# EAGLE board SparkX_EZ_LiPo_Power-Panel (EAGLE 9.6.2), part 1 of 14
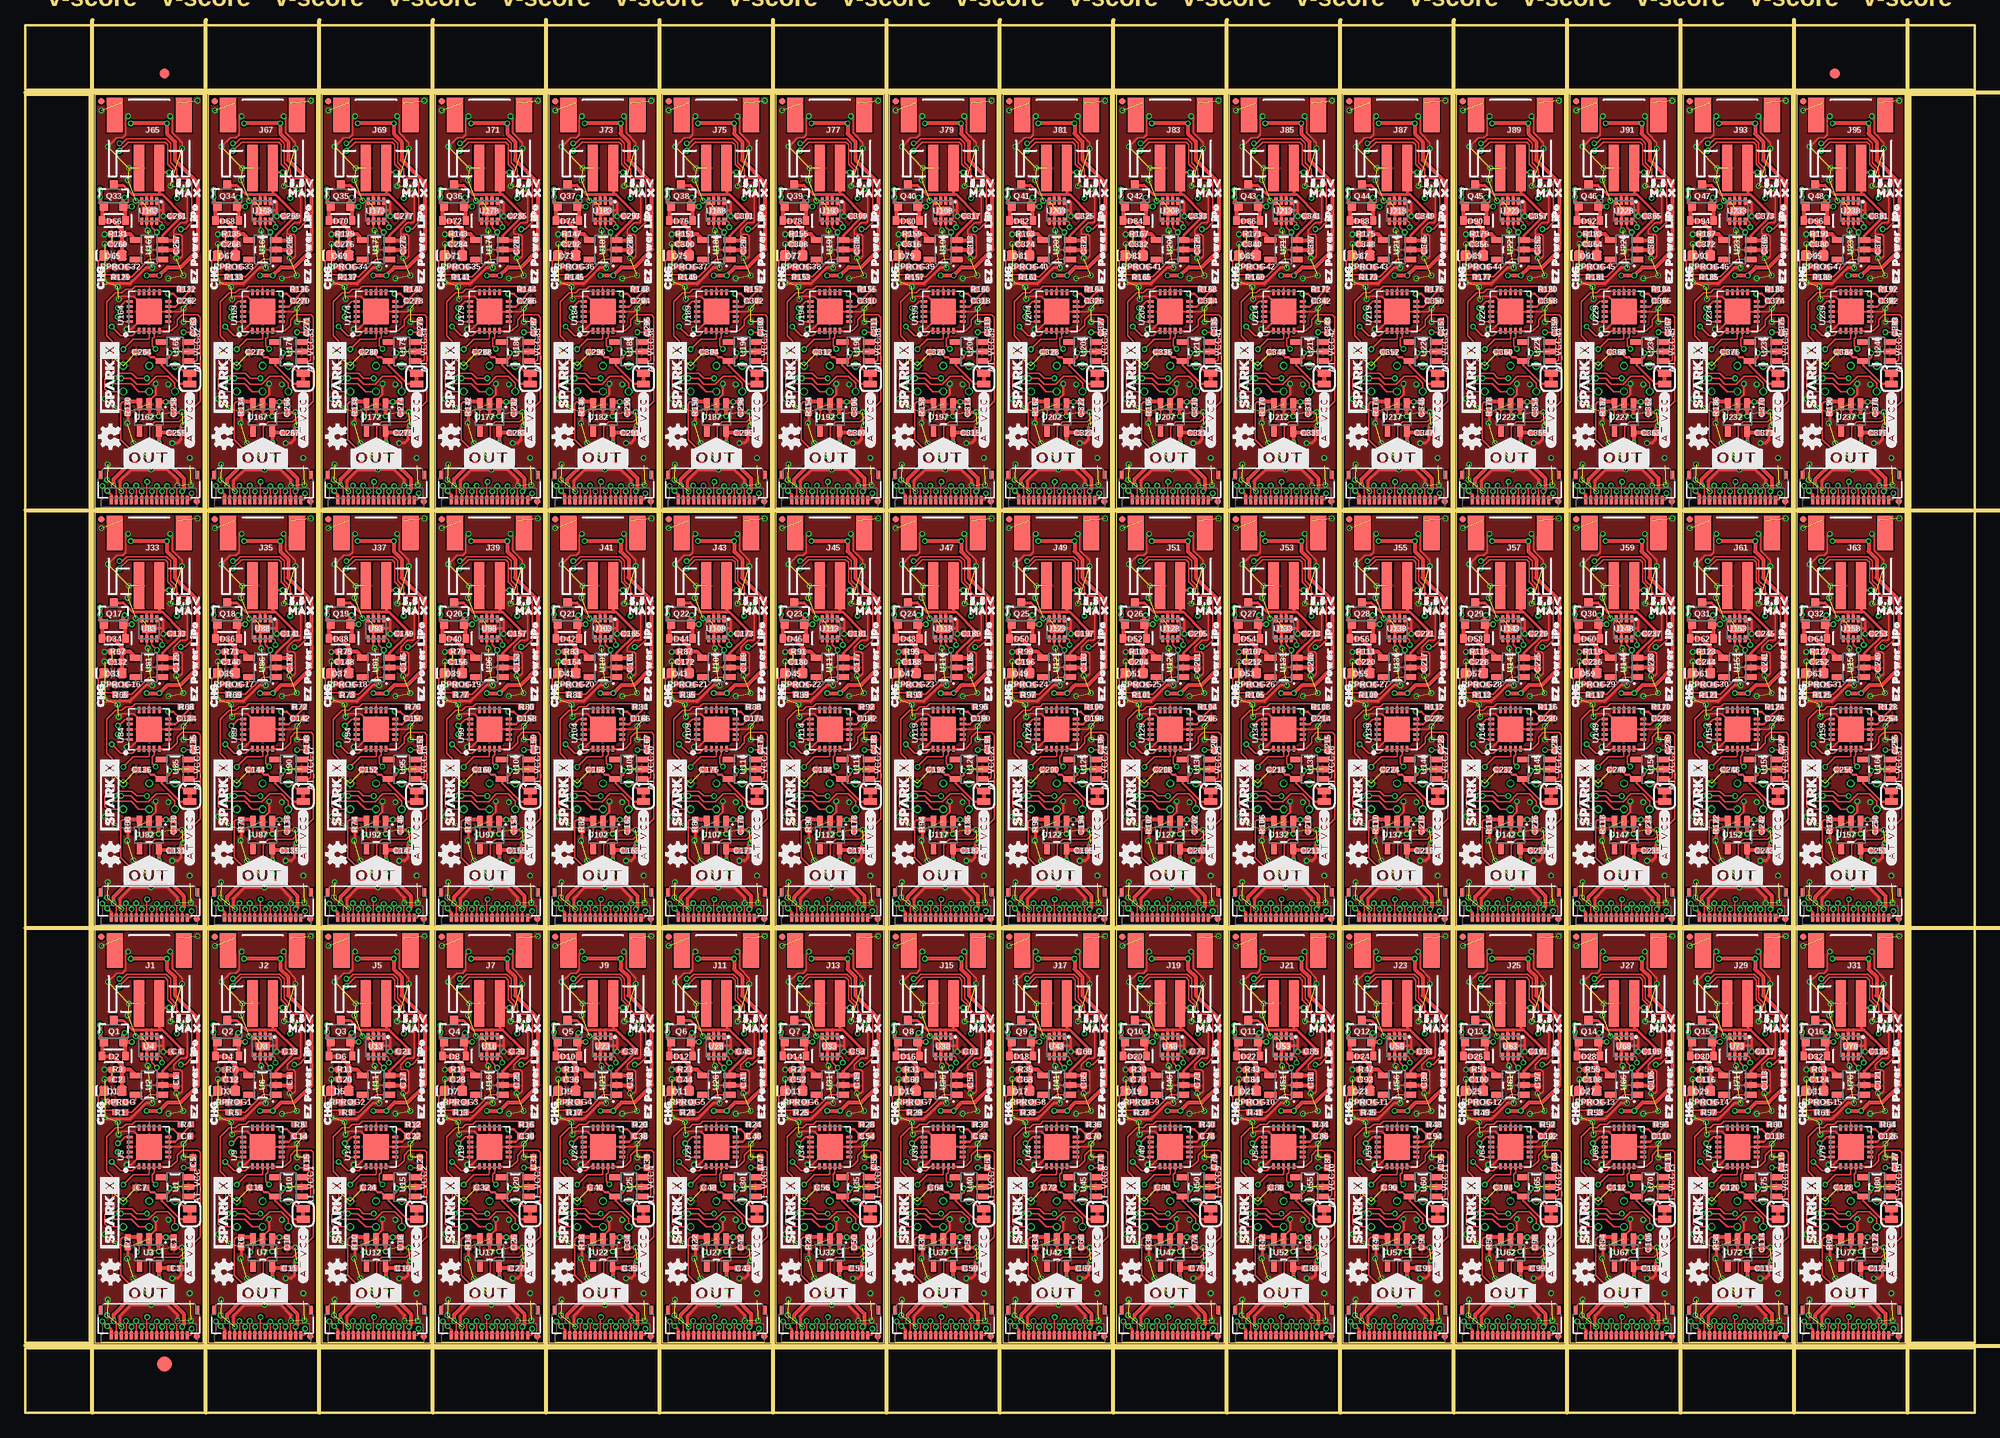
[diagram p0: board, top side]
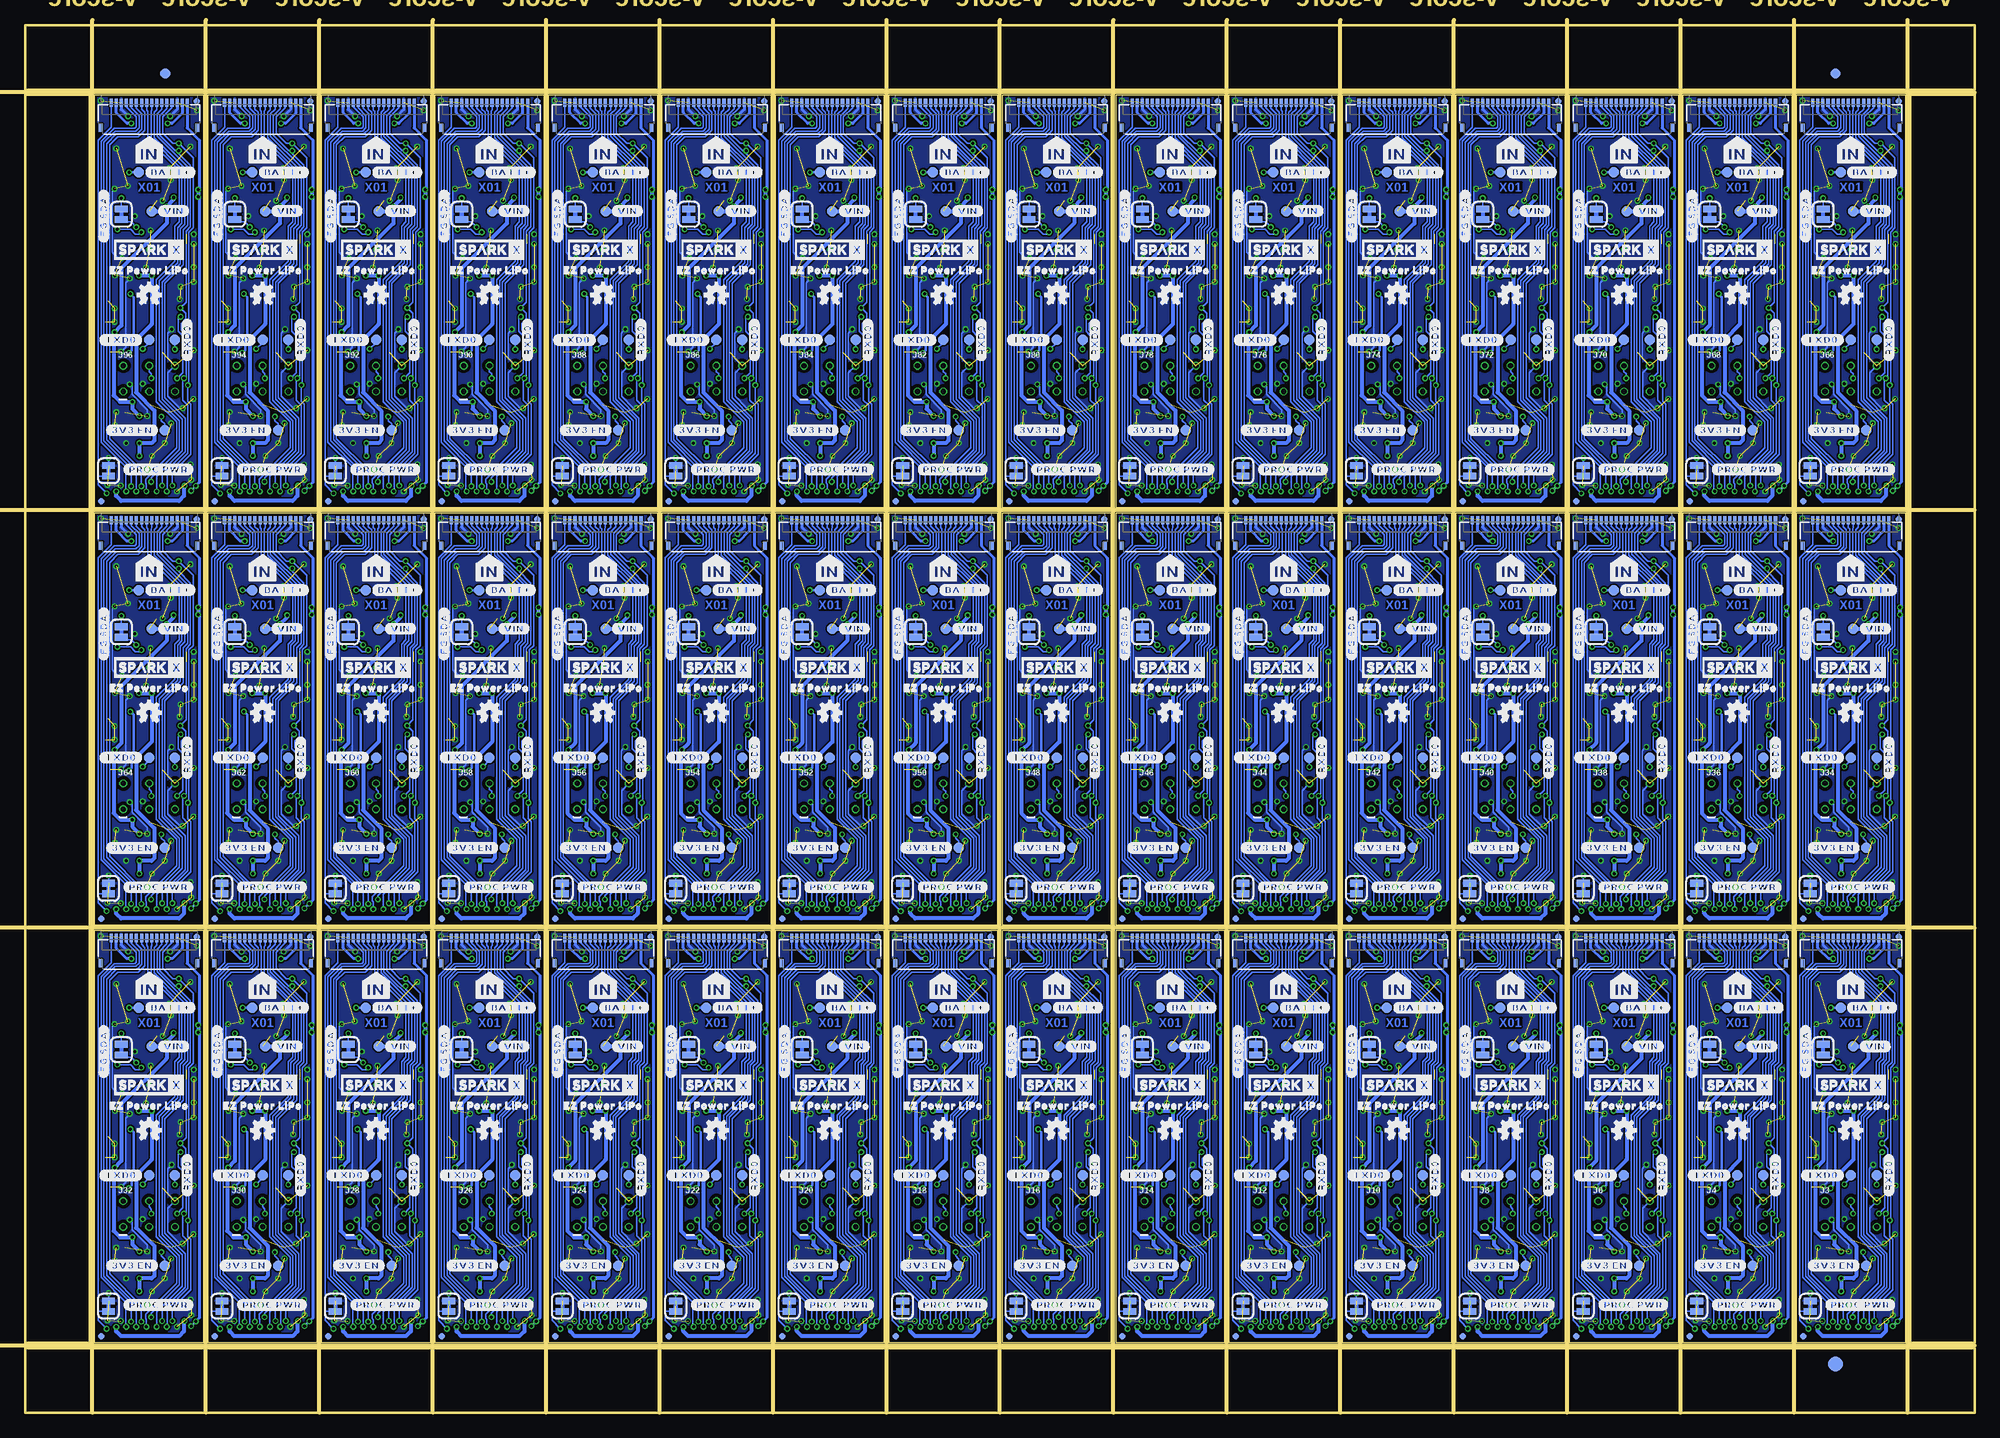
[diagram p1: board, bottom side, seen from below]

Size 192.02 x 136.65 mm. Coordinates in mm from the lower left corner, seen from the top.
Outline: 208 segments
Copper layers (1*16): Top 0.035mm / dielectric 1.5mm / Bottom 0.035mm
Design rules "SparkX_EZ_LiPo_Power": minimum track width 5mil, minimum drill 0.3mm, track to track 5mil, track to pad 5mil, pad to pad 5mil, via to via 5mil, smd to smd 5mil, copper to edge 7mil, drill to drill 7mil, minimum pad ring 5mil, minimum via ring 5mil, stop-mask expansion 2.5mil, vias tented up to drill 25mil, thermal gap 10mil
bRestrict: area 9.1,20.3 to 10.2,21.3; area 11.7,20.3 to 12.7,21.3; area 14.2,20.3 to 15.2,21.3; area 14.2,17.8 to 15.2,18.8; area 11.7,17.8 to 12.7,18.8; area 9.1,17.8 to 10.2,18.8; area 20.3,20.3 to 21.3,21.3; area 22.9,20.3 to 23.9,21.3; area 25.4,20.3 to 26.4,21.3; area 25.4,17.8 to 26.4,18.8; area 22.9,17.8 to 23.9,18.8; area 20.3,17.8 to 21.3,18.8; 276 more areas
Milling: 21 lines

## Footprints (pad centres in the part's own frame; a part is rotated, then mirrored left to right if it is on the bottom)
PAD.03X.04 = smd 1.016 x 1.016: 1 0,0
SMT-JUMPER_2_NC_TRACE_SILK = smd 0.66 x 1.27: 1 -0.521,0; 2 0.521,0
0402-TIGHT = smd 0.6 x 0.6: 1 -0.5,0; 2 0.5,0
LED-0603 = smd 1 x 1: A -0.877,0; C 0.877,0
SOD-323 = smd 0.63 x 0.83: A 1.15,0; C -1.15,0
FIDUCIAL-1X2 = smd 1 x 1: 1 0,0
FIDUCIAL-1.5X3 = smd 1.5 x 1.5: 1 0,0
FIDUCIAL-MICRO = smd 0.635 x 0.635: 1 0,0
FPC_16_DOUBLESIDED_BACKFLIP = smd 0.3 x 0.8: 1 -3.75,1.35; 2 -3.25,1.35; 3 -2.75,1.35; 4 -2.25,1.35; 5 -1.75,1.35; 6 -1.25,1.35; 7 -0.75,1.35; 8 -0.25,1.35; 9 0.25,1.35; 10 0.75,1.35; 11 1.25,1.35; 12 1.75,1.35; 13 2.25,1.35; 14 2.75,1.35; 15 3.25,1.35; 16 3.75,1.35 | smd 0.4 x 0.8: MP1 -4.75,-1.15; MP2 4.75,-1.15
JST-2-SMD = smd 1 x 4.6: 1 -1,-3.7; 2 1,-3.7 | smd 1.6 x 3.4: NC1 -3.4,1.5; NC2 3.4,1.5
2X3_TEST_POINTS = drill 0.508: 1 -2.54,-1.27; 2 -2.54,1.27; 3 0,-1.27; 4 0,1.27; 5 2.54,-1.27; 6 2.54,1.27
SOT23-3 = smd 0.8 x 0.9: 1 -0.95,-1; 2 0.95,-1; 3 0,1.1
SOT23-5 = smd 0.55 x 1.2: 1 -0.95,-1.3; 2 0,-1.3; 3 0.95,-1.3; 4 0.95,1.3; 5 -0.95,1.3
DFN-8 = smd 0.3 x 0.7: 1 -0.75,-0.99; 2 -0.25,-0.99; 3 0.25,-0.99; 4 0.75,-0.99; 5 0.75,0.99; 6 0.25,0.99; 7 -0.25,0.99; 8 -0.75,0.99 | smd 1.38 x 0.8: 9 0,0
QFN20_20M1 = smd 0.6 x 0.25: 1 -1.9,1; 2 -1.9,0.5; 3 -1.9,0; 4 -1.9,-0.5; 5 -1.9,-1; 11 1.9,-1; 12 1.9,-0.5; 13 1.9,0; 14 1.9,0.5; 15 1.9,1 | smd 0.25 x 0.6: 6 -1,-1.9; 7 -0.5,-1.9; 8 0,-1.9; 9 0.5,-1.9; 10 1,-1.9; 16 1,1.9; 17 0.5,1.9; 18 0,1.9; 19 -0.5,1.9; 20 -1,1.9 | smd 2.5 x 2.5: PAD 0,0

## Placement (x,y rotation side)
3V3_EN  TEST-POINT3X4  [PAD.03X.04]  10.67,14.48 0 bottom
3V3_EN1  TEST-POINT3X4  [PAD.03X.04]  21.84,14.48 0 bottom
3V3_EN2  TEST-POINT3X4  [PAD.03X.04]  33.02,14.48 0 bottom
3V3_EN3  TEST-POINT3X4  [PAD.03X.04]  44.2,14.48 0 bottom
3V3_EN4  TEST-POINT3X4  [PAD.03X.04]  55.37,14.48 0 bottom
3V3_EN5  TEST-POINT3X4  [PAD.03X.04]  66.55,14.48 0 bottom
3V3_EN6  TEST-POINT3X4  [PAD.03X.04]  77.72,14.48 0 bottom
3V3_EN7  TEST-POINT3X4  [PAD.03X.04]  88.9,14.48 0 bottom
3V3_EN8  TEST-POINT3X4  [PAD.03X.04]  100.08,14.48 0 bottom
3V3_EN9  TEST-POINT3X4  [PAD.03X.04]  111.25,14.48 0 bottom
3V3_EN10  TEST-POINT3X4  [PAD.03X.04]  122.43,14.48 0 bottom
3V3_EN11  TEST-POINT3X4  [PAD.03X.04]  133.6,14.48 0 bottom
3V3_EN12  TEST-POINT3X4  [PAD.03X.04]  144.78,14.48 0 bottom
3V3_EN13  TEST-POINT3X4  [PAD.03X.04]  155.96,14.48 0 bottom
3V3_EN14  TEST-POINT3X4  [PAD.03X.04]  167.13,14.48 0 bottom
3V3_EN15  TEST-POINT3X4  [PAD.03X.04]  178.31,14.48 0 bottom
3V3_EN16  TEST-POINT3X4  [PAD.03X.04]  10.67,55.63 0 bottom
3V3_EN17  TEST-POINT3X4  [PAD.03X.04]  21.84,55.63 0 bottom
3V3_EN18  TEST-POINT3X4  [PAD.03X.04]  33.02,55.63 0 bottom
3V3_EN19  TEST-POINT3X4  [PAD.03X.04]  44.2,55.63 0 bottom
3V3_EN20  TEST-POINT3X4  [PAD.03X.04]  55.37,55.63 0 bottom
3V3_EN21  TEST-POINT3X4  [PAD.03X.04]  66.55,55.63 0 bottom
3V3_EN22  TEST-POINT3X4  [PAD.03X.04]  77.72,55.63 0 bottom
3V3_EN23  TEST-POINT3X4  [PAD.03X.04]  88.9,55.63 0 bottom
3V3_EN24  TEST-POINT3X4  [PAD.03X.04]  100.08,55.63 0 bottom
3V3_EN25  TEST-POINT3X4  [PAD.03X.04]  111.25,55.63 0 bottom
3V3_EN26  TEST-POINT3X4  [PAD.03X.04]  122.43,55.63 0 bottom
3V3_EN27  TEST-POINT3X4  [PAD.03X.04]  133.6,55.63 0 bottom
3V3_EN28  TEST-POINT3X4  [PAD.03X.04]  144.78,55.63 0 bottom
3V3_EN29  TEST-POINT3X4  [PAD.03X.04]  155.96,55.63 0 bottom
3V3_EN30  TEST-POINT3X4  [PAD.03X.04]  167.13,55.63 0 bottom
3V3_EN31  TEST-POINT3X4  [PAD.03X.04]  178.31,55.63 0 bottom
3V3_EN32  TEST-POINT3X4  [PAD.03X.04]  10.67,96.77 0 bottom
3V3_EN33  TEST-POINT3X4  [PAD.03X.04]  21.84,96.77 0 bottom
3V3_EN34  TEST-POINT3X4  [PAD.03X.04]  33.02,96.77 0 bottom
3V3_EN35  TEST-POINT3X4  [PAD.03X.04]  44.2,96.77 0 bottom
3V3_EN36  TEST-POINT3X4  [PAD.03X.04]  55.37,96.77 0 bottom
3V3_EN37  TEST-POINT3X4  [PAD.03X.04]  66.55,96.77 0 bottom
3V3_EN38  TEST-POINT3X4  [PAD.03X.04]  77.72,96.77 0 bottom
3V3_EN39  TEST-POINT3X4  [PAD.03X.04]  88.9,96.77 0 bottom
3V3_EN40  TEST-POINT3X4  [PAD.03X.04]  100.08,96.77 0 bottom
3V3_EN41  TEST-POINT3X4  [PAD.03X.04]  111.25,96.77 0 bottom
3V3_EN42  TEST-POINT3X4  [PAD.03X.04]  122.43,96.77 0 bottom
3V3_EN43  TEST-POINT3X4  [PAD.03X.04]  133.6,96.77 0 bottom
3V3_EN44  TEST-POINT3X4  [PAD.03X.04]  144.78,96.77 0 bottom
3V3_EN45  TEST-POINT3X4  [PAD.03X.04]  155.96,96.77 0 bottom
3V3_EN46  TEST-POINT3X4  [PAD.03X.04]  167.13,96.77 0 bottom
3V3_EN47  TEST-POINT3X4  [PAD.03X.04]  178.31,96.77 0 bottom
AT_VCC  JUMPER-SMT_2_NC_TRACE_SILK  [SMT-JUMPER_2_NC_TRACE_SILK]  16.19,19.56 270 top
AT_VCC1  JUMPER-SMT_2_NC_TRACE_SILK  [SMT-JUMPER_2_NC_TRACE_SILK]  27.37,19.56 270 top
AT_VCC2  JUMPER-SMT_2_NC_TRACE_SILK  [SMT-JUMPER_2_NC_TRACE_SILK]  38.54,19.56 270 top
AT_VCC3  JUMPER-SMT_2_NC_TRACE_SILK  [SMT-JUMPER_2_NC_TRACE_SILK]  49.72,19.56 270 top
AT_VCC4  JUMPER-SMT_2_NC_TRACE_SILK  [SMT-JUMPER_2_NC_TRACE_SILK]  60.9,19.56 270 top
AT_VCC5  JUMPER-SMT_2_NC_TRACE_SILK  [SMT-JUMPER_2_NC_TRACE_SILK]  72.07,19.56 270 top
AT_VCC6  JUMPER-SMT_2_NC_TRACE_SILK  [SMT-JUMPER_2_NC_TRACE_SILK]  83.25,19.56 270 top
AT_VCC7  JUMPER-SMT_2_NC_TRACE_SILK  [SMT-JUMPER_2_NC_TRACE_SILK]  94.42,19.56 270 top
AT_VCC8  JUMPER-SMT_2_NC_TRACE_SILK  [SMT-JUMPER_2_NC_TRACE_SILK]  105.6,19.56 270 top
AT_VCC9  JUMPER-SMT_2_NC_TRACE_SILK  [SMT-JUMPER_2_NC_TRACE_SILK]  116.78,19.56 270 top
AT_VCC10  JUMPER-SMT_2_NC_TRACE_SILK  [SMT-JUMPER_2_NC_TRACE_SILK]  127.95,19.56 270 top
AT_VCC11  JUMPER-SMT_2_NC_TRACE_SILK  [SMT-JUMPER_2_NC_TRACE_SILK]  139.13,19.56 270 top
AT_VCC12  JUMPER-SMT_2_NC_TRACE_SILK  [SMT-JUMPER_2_NC_TRACE_SILK]  150.3,19.56 270 top
AT_VCC13  JUMPER-SMT_2_NC_TRACE_SILK  [SMT-JUMPER_2_NC_TRACE_SILK]  161.48,19.56 270 top
AT_VCC14  JUMPER-SMT_2_NC_TRACE_SILK  [SMT-JUMPER_2_NC_TRACE_SILK]  172.66,19.56 270 top
AT_VCC15  JUMPER-SMT_2_NC_TRACE_SILK  [SMT-JUMPER_2_NC_TRACE_SILK]  183.83,19.56 270 top
AT_VCC16  JUMPER-SMT_2_NC_TRACE_SILK  [SMT-JUMPER_2_NC_TRACE_SILK]  16.19,60.71 270 top
AT_VCC17  JUMPER-SMT_2_NC_TRACE_SILK  [SMT-JUMPER_2_NC_TRACE_SILK]  27.37,60.71 270 top
AT_VCC18  JUMPER-SMT_2_NC_TRACE_SILK  [SMT-JUMPER_2_NC_TRACE_SILK]  38.54,60.71 270 top
AT_VCC19  JUMPER-SMT_2_NC_TRACE_SILK  [SMT-JUMPER_2_NC_TRACE_SILK]  49.72,60.71 270 top
AT_VCC20  JUMPER-SMT_2_NC_TRACE_SILK  [SMT-JUMPER_2_NC_TRACE_SILK]  60.9,60.71 270 top
AT_VCC21  JUMPER-SMT_2_NC_TRACE_SILK  [SMT-JUMPER_2_NC_TRACE_SILK]  72.07,60.71 270 top
AT_VCC22  JUMPER-SMT_2_NC_TRACE_SILK  [SMT-JUMPER_2_NC_TRACE_SILK]  83.25,60.71 270 top
AT_VCC23  JUMPER-SMT_2_NC_TRACE_SILK  [SMT-JUMPER_2_NC_TRACE_SILK]  94.42,60.71 270 top
AT_VCC24  JUMPER-SMT_2_NC_TRACE_SILK  [SMT-JUMPER_2_NC_TRACE_SILK]  105.6,60.71 270 top
AT_VCC25  JUMPER-SMT_2_NC_TRACE_SILK  [SMT-JUMPER_2_NC_TRACE_SILK]  116.78,60.71 270 top
AT_VCC26  JUMPER-SMT_2_NC_TRACE_SILK  [SMT-JUMPER_2_NC_TRACE_SILK]  127.95,60.71 270 top
AT_VCC27  JUMPER-SMT_2_NC_TRACE_SILK  [SMT-JUMPER_2_NC_TRACE_SILK]  139.13,60.71 270 top
AT_VCC28  JUMPER-SMT_2_NC_TRACE_SILK  [SMT-JUMPER_2_NC_TRACE_SILK]  150.3,60.71 270 top
AT_VCC29  JUMPER-SMT_2_NC_TRACE_SILK  [SMT-JUMPER_2_NC_TRACE_SILK]  161.48,60.71 270 top
AT_VCC30  JUMPER-SMT_2_NC_TRACE_SILK  [SMT-JUMPER_2_NC_TRACE_SILK]  172.66,60.71 270 top
AT_VCC31  JUMPER-SMT_2_NC_TRACE_SILK  [SMT-JUMPER_2_NC_TRACE_SILK]  183.83,60.71 270 top
AT_VCC32  JUMPER-SMT_2_NC_TRACE_SILK  [SMT-JUMPER_2_NC_TRACE_SILK]  16.19,101.85 270 top
AT_VCC33  JUMPER-SMT_2_NC_TRACE_SILK  [SMT-JUMPER_2_NC_TRACE_SILK]  27.37,101.85 270 top
AT_VCC34  JUMPER-SMT_2_NC_TRACE_SILK  [SMT-JUMPER_2_NC_TRACE_SILK]  38.54,101.85 270 top
AT_VCC35  JUMPER-SMT_2_NC_TRACE_SILK  [SMT-JUMPER_2_NC_TRACE_SILK]  49.72,101.85 270 top
AT_VCC36  JUMPER-SMT_2_NC_TRACE_SILK  [SMT-JUMPER_2_NC_TRACE_SILK]  60.9,101.85 270 top
AT_VCC37  JUMPER-SMT_2_NC_TRACE_SILK  [SMT-JUMPER_2_NC_TRACE_SILK]  72.07,101.85 270 top
AT_VCC38  JUMPER-SMT_2_NC_TRACE_SILK  [SMT-JUMPER_2_NC_TRACE_SILK]  83.25,101.85 270 top
AT_VCC39  JUMPER-SMT_2_NC_TRACE_SILK  [SMT-JUMPER_2_NC_TRACE_SILK]  94.42,101.85 270 top
AT_VCC40  JUMPER-SMT_2_NC_TRACE_SILK  [SMT-JUMPER_2_NC_TRACE_SILK]  105.6,101.85 270 top
AT_VCC41  JUMPER-SMT_2_NC_TRACE_SILK  [SMT-JUMPER_2_NC_TRACE_SILK]  116.78,101.85 270 top
AT_VCC42  JUMPER-SMT_2_NC_TRACE_SILK  [SMT-JUMPER_2_NC_TRACE_SILK]  127.95,101.85 270 top
AT_VCC43  JUMPER-SMT_2_NC_TRACE_SILK  [SMT-JUMPER_2_NC_TRACE_SILK]  139.13,101.85 270 top
AT_VCC44  JUMPER-SMT_2_NC_TRACE_SILK  [SMT-JUMPER_2_NC_TRACE_SILK]  150.3,101.85 270 top
AT_VCC45  JUMPER-SMT_2_NC_TRACE_SILK  [SMT-JUMPER_2_NC_TRACE_SILK]  161.48,101.85 270 top
AT_VCC46  JUMPER-SMT_2_NC_TRACE_SILK  [SMT-JUMPER_2_NC_TRACE_SILK]  172.66,101.85 270 top
AT_VCC47  JUMPER-SMT_2_NC_TRACE_SILK  [SMT-JUMPER_2_NC_TRACE_SILK]  183.83,101.85 270 top
BATT+  TEST-POINT3X4  [PAD.03X.04]  13.21,39.88 0 bottom
BATT+1  TEST-POINT3X4  [PAD.03X.04]  24.38,39.88 0 bottom
BATT+2  TEST-POINT3X4  [PAD.03X.04]  35.56,39.88 0 bottom
BATT+3  TEST-POINT3X4  [PAD.03X.04]  46.74,39.88 0 bottom
BATT+4  TEST-POINT3X4  [PAD.03X.04]  57.91,39.88 0 bottom
BATT+5  TEST-POINT3X4  [PAD.03X.04]  69.09,39.88 0 bottom
BATT+6  TEST-POINT3X4  [PAD.03X.04]  80.26,39.88 0 bottom
BATT+7  TEST-POINT3X4  [PAD.03X.04]  91.44,39.88 0 bottom
BATT+8  TEST-POINT3X4  [PAD.03X.04]  102.62,39.88 0 bottom
BATT+9  TEST-POINT3X4  [PAD.03X.04]  113.79,39.88 0 bottom
BATT+10  TEST-POINT3X4  [PAD.03X.04]  124.97,39.88 0 bottom
BATT+11  TEST-POINT3X4  [PAD.03X.04]  136.14,39.88 0 bottom
BATT+12  TEST-POINT3X4  [PAD.03X.04]  147.32,39.88 0 bottom
BATT+13  TEST-POINT3X4  [PAD.03X.04]  158.5,39.88 0 bottom
BATT+14  TEST-POINT3X4  [PAD.03X.04]  169.67,39.88 0 bottom
BATT+15  TEST-POINT3X4  [PAD.03X.04]  180.85,39.88 0 bottom
BATT+16  TEST-POINT3X4  [PAD.03X.04]  13.21,81.03 0 bottom
BATT+17  TEST-POINT3X4  [PAD.03X.04]  24.38,81.03 0 bottom
BATT+18  TEST-POINT3X4  [PAD.03X.04]  35.56,81.03 0 bottom
BATT+19  TEST-POINT3X4  [PAD.03X.04]  46.74,81.03 0 bottom
BATT+20  TEST-POINT3X4  [PAD.03X.04]  57.91,81.03 0 bottom
BATT+21  TEST-POINT3X4  [PAD.03X.04]  69.09,81.03 0 bottom
BATT+22  TEST-POINT3X4  [PAD.03X.04]  80.26,81.03 0 bottom
BATT+23  TEST-POINT3X4  [PAD.03X.04]  91.44,81.03 0 bottom
BATT+24  TEST-POINT3X4  [PAD.03X.04]  102.62,81.03 0 bottom
BATT+25  TEST-POINT3X4  [PAD.03X.04]  113.79,81.03 0 bottom
BATT+26  TEST-POINT3X4  [PAD.03X.04]  124.97,81.03 0 bottom
BATT+27  TEST-POINT3X4  [PAD.03X.04]  136.14,81.03 0 bottom
BATT+28  TEST-POINT3X4  [PAD.03X.04]  147.32,81.03 0 bottom
BATT+29  TEST-POINT3X4  [PAD.03X.04]  158.5,81.03 0 bottom
BATT+30  TEST-POINT3X4  [PAD.03X.04]  169.67,81.03 0 bottom
BATT+31  TEST-POINT3X4  [PAD.03X.04]  180.85,81.03 0 bottom
BATT+32  TEST-POINT3X4  [PAD.03X.04]  13.21,122.17 0 bottom
BATT+33  TEST-POINT3X4  [PAD.03X.04]  24.38,122.17 0 bottom
BATT+34  TEST-POINT3X4  [PAD.03X.04]  35.56,122.17 0 bottom
BATT+35  TEST-POINT3X4  [PAD.03X.04]  46.74,122.17 0 bottom
BATT+36  TEST-POINT3X4  [PAD.03X.04]  57.91,122.17 0 bottom
BATT+37  TEST-POINT3X4  [PAD.03X.04]  69.09,122.17 0 bottom
BATT+38  TEST-POINT3X4  [PAD.03X.04]  80.26,122.17 0 bottom
BATT+39  TEST-POINT3X4  [PAD.03X.04]  91.44,122.17 0 bottom
BATT+40  TEST-POINT3X4  [PAD.03X.04]  102.62,122.17 0 bottom
BATT+41  TEST-POINT3X4  [PAD.03X.04]  113.79,122.17 0 bottom
BATT+42  TEST-POINT3X4  [PAD.03X.04]  124.97,122.17 0 bottom
BATT+43  TEST-POINT3X4  [PAD.03X.04]  136.14,122.17 0 bottom
BATT+44  TEST-POINT3X4  [PAD.03X.04]  147.32,122.17 0 bottom
BATT+45  TEST-POINT3X4  [PAD.03X.04]  158.5,122.17 0 bottom
BATT+46  TEST-POINT3X4  [PAD.03X.04]  169.67,122.17 0 bottom
BATT+47  TEST-POINT3X4  [PAD.03X.04]  180.85,122.17 0 bottom
C1  2.2uF  [0402-TIGHT]  14.61,16.76 270 top
C2  2.2uF  [0402-TIGHT]  9.02,32.83 180 top
C3  2.2uF  [0402-TIGHT]  14.8,14.22 0 top
C4  0.1uF  [0402-TIGHT]  14.86,35.56 180 top
C5  2.2uF  [0402-TIGHT]  16.51,24.64 90 top
C6  4.7uF  [0402-TIGHT]  14.86,32.7 270 top
C7  2.2uF  [0402-TIGHT]  11.4,22.16 180 top
C8  0.1uF  [0402-TIGHT]  15.75,27.24 0 top
C9  4.7uF  [0402-TIGHT]  26.04,32.7 270 top
C10  2.2uF  [0402-TIGHT]  25.78,16.76 270 top
C11  2.2uF  [0402-TIGHT]  25.97,14.22 0 top
C12  2.2uF  [0402-TIGHT]  20.19,32.83 180 top
C13  0.1uF  [0402-TIGHT]  26.04,35.56 180 top
C14  0.1uF  [0402-TIGHT]  26.92,27.24 0 top
C15  2.2uF  [0402-TIGHT]  27.69,24.64 90 top
C16  2.2uF  [0402-TIGHT]  22.57,22.16 180 top
C17  4.7uF  [0402-TIGHT]  37.21,32.7 270 top
C18  2.2uF  [0402-TIGHT]  36.96,16.76 270 top
C19  2.2uF  [0402-TIGHT]  37.15,14.22 0 top
C20  2.2uF  [0402-TIGHT]  31.37,32.83 180 top
C21  0.1uF  [0402-TIGHT]  37.21,35.56 180 top
C22  0.1uF  [0402-TIGHT]  38.1,27.24 0 top
C23  2.2uF  [0402-TIGHT]  38.86,24.64 90 top
C24  2.2uF  [0402-TIGHT]  33.75,22.16 180 top
C25  4.7uF  [0402-TIGHT]  48.39,32.7 270 top
C26  2.2uF  [0402-TIGHT]  48.13,16.76 270 top
C27  2.2uF  [0402-TIGHT]  48.32,14.22 0 top
C28  2.2uF  [0402-TIGHT]  42.54,32.83 180 top
C29  0.1uF  [0402-TIGHT]  48.39,35.56 180 top
C30  0.1uF  [0402-TIGHT]  49.28,27.24 0 top
C31  2.2uF  [0402-TIGHT]  50.04,24.64 90 top
C32  2.2uF  [0402-TIGHT]  44.93,22.16 180 top
C33  4.7uF  [0402-TIGHT]  59.56,32.7 270 top
C34  2.2uF  [0402-TIGHT]  59.31,16.76 270 top
C35  2.2uF  [0402-TIGHT]  59.5,14.22 0 top
C36  2.2uF  [0402-TIGHT]  53.72,32.83 180 top
C37  0.1uF  [0402-TIGHT]  59.56,35.56 180 top
C38  0.1uF  [0402-TIGHT]  60.45,27.24 0 top
C39  2.2uF  [0402-TIGHT]  61.21,24.64 90 top
C40  2.2uF  [0402-TIGHT]  56.1,22.16 180 top
C41  4.7uF  [0402-TIGHT]  70.74,32.7 270 top
C42  2.2uF  [0402-TIGHT]  70.48,16.76 270 top
C43  2.2uF  [0402-TIGHT]  70.68,14.22 0 top
C44  2.2uF  [0402-TIGHT]  64.9,32.83 180 top
C45  0.1uF  [0402-TIGHT]  70.74,35.56 180 top
C46  0.1uF  [0402-TIGHT]  71.63,27.24 0 top
C47  2.2uF  [0402-TIGHT]  72.39,24.64 90 top
C48  2.2uF  [0402-TIGHT]  67.28,22.16 180 top
C49  4.7uF  [0402-TIGHT]  81.92,32.7 270 top
C50  2.2uF  [0402-TIGHT]  81.66,16.76 270 top
C51  2.2uF  [0402-TIGHT]  81.85,14.22 0 top
C52  2.2uF  [0402-TIGHT]  76.07,32.83 180 top
C53  0.1uF  [0402-TIGHT]  81.92,35.56 180 top
C54  0.1uF  [0402-TIGHT]  82.8,27.24 0 top
C55  2.2uF  [0402-TIGHT]  83.57,24.64 90 top
C56  2.2uF  [0402-TIGHT]  78.45,22.16 180 top
C57  4.7uF  [0402-TIGHT]  93.09,32.7 270 top
C58  2.2uF  [0402-TIGHT]  92.84,16.76 270 top
C59  2.2uF  [0402-TIGHT]  93.03,14.22 0 top
C60  2.2uF  [0402-TIGHT]  87.25,32.83 180 top
C61  0.1uF  [0402-TIGHT]  93.09,35.56 180 top
C62  0.1uF  [0402-TIGHT]  93.98,27.24 0 top
C63  2.2uF  [0402-TIGHT]  94.74,24.64 90 top
C64  2.2uF  [0402-TIGHT]  89.63,22.16 180 top
C65  4.7uF  [0402-TIGHT]  104.27,32.7 270 top
C66  2.2uF  [0402-TIGHT]  104.01,16.76 270 top
C67  2.2uF  [0402-TIGHT]  104.2,14.22 0 top
C68  2.2uF  [0402-TIGHT]  98.42,32.83 180 top
C69  0.1uF  [0402-TIGHT]  104.27,35.56 180 top
C70  0.1uF  [0402-TIGHT]  105.16,27.24 0 top
C71  2.2uF  [0402-TIGHT]  105.92,24.64 90 top
C72  2.2uF  [0402-TIGHT]  100.81,22.16 180 top
C73  4.7uF  [0402-TIGHT]  115.44,32.7 270 top
C74  2.2uF  [0402-TIGHT]  115.19,16.76 270 top
C75  2.2uF  [0402-TIGHT]  115.38,14.22 0 top
C76  2.2uF  [0402-TIGHT]  109.6,32.83 180 top
C77  0.1uF  [0402-TIGHT]  115.44,35.56 180 top
C78  0.1uF  [0402-TIGHT]  116.33,27.24 0 top
C79  2.2uF  [0402-TIGHT]  117.09,24.64 90 top
C80  2.2uF  [0402-TIGHT]  111.98,22.16 180 top
C81  4.7uF  [0402-TIGHT]  126.62,32.7 270 top
C82  2.2uF  [0402-TIGHT]  126.37,16.76 270 top
C83  2.2uF  [0402-TIGHT]  126.56,14.22 0 top
C84  2.2uF  [0402-TIGHT]  120.78,32.83 180 top
C85  0.1uF  [0402-TIGHT]  126.62,35.56 180 top
C86  0.1uF  [0402-TIGHT]  127.51,27.24 0 top
C87  2.2uF  [0402-TIGHT]  128.27,24.64 90 top
C88  2.2uF  [0402-TIGHT]  123.16,22.16 180 top
C89  4.7uF  [0402-TIGHT]  137.8,32.7 270 top
C90  2.2uF  [0402-TIGHT]  137.54,16.76 270 top
C91  2.2uF  [0402-TIGHT]  137.73,14.22 0 top
C92  2.2uF  [0402-TIGHT]  131.95,32.83 180 top
C93  0.1uF  [0402-TIGHT]  137.8,35.56 180 top
C94  0.1uF  [0402-TIGHT]  138.68,27.24 0 top
C95  2.2uF  [0402-TIGHT]  139.45,24.64 90 top
C96  2.2uF  [0402-TIGHT]  134.33,22.16 180 top
C97  4.7uF  [0402-TIGHT]  148.97,32.7 270 top
C98  2.2uF  [0402-TIGHT]  148.72,16.76 270 top
C99  2.2uF  [0402-TIGHT]  148.91,14.22 0 top
C100  2.2uF  [0402-TIGHT]  143.13,32.83 180 top
C101  0.1uF  [0402-TIGHT]  148.97,35.56 180 top
C102  0.1uF  [0402-TIGHT]  149.86,27.24 0 top
C103  2.2uF  [0402-TIGHT]  150.62,24.64 90 top
C104  2.2uF  [0402-TIGHT]  145.51,22.16 180 top
C105  4.7uF  [0402-TIGHT]  160.15,32.7 270 top
C106  2.2uF  [0402-TIGHT]  159.89,16.76 270 top
C107  2.2uF  [0402-TIGHT]  160.08,14.22 0 top
C108  2.2uF  [0402-TIGHT]  154.31,32.83 180 top
C109  0.1uF  [0402-TIGHT]  160.15,35.56 180 top
C110  0.1uF  [0402-TIGHT]  161.04,27.24 0 top
C111  2.2uF  [0402-TIGHT]  161.8,24.64 90 top
C112  2.2uF  [0402-TIGHT]  156.69,22.16 180 top
C113  4.7uF  [0402-TIGHT]  171.32,32.7 270 top
C114  2.2uF  [0402-TIGHT]  171.07,16.76 270 top
C115  2.2uF  [0402-TIGHT]  171.26,14.22 0 top
C116  2.2uF  [0402-TIGHT]  165.48,32.83 180 top
C117  0.1uF  [0402-TIGHT]  171.32,35.56 180 top
C118  0.1uF  [0402-TIGHT]  172.21,27.24 0 top
C119  2.2uF  [0402-TIGHT]  172.97,24.64 90 top
C120  2.2uF  [0402-TIGHT]  167.86,22.16 180 top
C121  4.7uF  [0402-TIGHT]  182.5,32.7 270 top
C122  2.2uF  [0402-TIGHT]  182.25,16.76 270 top
C123  2.2uF  [0402-TIGHT]  182.44,14.22 0 top
C124  2.2uF  [0402-TIGHT]  176.66,32.83 180 top
C125  0.1uF  [0402-TIGHT]  182.5,35.56 180 top
C126  0.1uF  [0402-TIGHT]  183.39,27.24 0 top
C127  2.2uF  [0402-TIGHT]  184.15,24.64 90 top
C128  2.2uF  [0402-TIGHT]  179.04,22.16 180 top
C129  4.7uF  [0402-TIGHT]  14.86,73.85 270 top
C130  2.2uF  [0402-TIGHT]  14.61,57.91 270 top
C131  2.2uF  [0402-TIGHT]  14.8,55.37 0 top
C132  2.2uF  [0402-TIGHT]  9.02,73.98 180 top
C133  0.1uF  [0402-TIGHT]  14.86,76.71 180 top
C134  0.1uF  [0402-TIGHT]  15.75,68.39 0 top
C135  2.2uF  [0402-TIGHT]  16.51,65.79 90 top
C136  2.2uF  [0402-TIGHT]  11.4,63.31 180 top
C137  4.7uF  [0402-TIGHT]  26.04,73.85 270 top
C138  2.2uF  [0402-TIGHT]  25.78,57.91 270 top
C139  2.2uF  [0402-TIGHT]  25.97,55.37 0 top
C140  2.2uF  [0402-TIGHT]  20.19,73.98 180 top
C141  0.1uF  [0402-TIGHT]  26.04,76.71 180 top
C142  0.1uF  [0402-TIGHT]  26.92,68.39 0 top
C143  2.2uF  [0402-TIGHT]  27.69,65.79 90 top
C144  2.2uF  [0402-TIGHT]  22.57,63.31 180 top
C145  4.7uF  [0402-TIGHT]  37.21,73.85 270 top
C146  2.2uF  [0402-TIGHT]  36.96,57.91 270 top
C147  2.2uF  [0402-TIGHT]  37.15,55.37 0 top
C148  2.2uF  [0402-TIGHT]  31.37,73.98 180 top
C149  0.1uF  [0402-TIGHT]  37.21,76.71 180 top
C150  0.1uF  [0402-TIGHT]  38.1,68.39 0 top
C151  2.2uF  [0402-TIGHT]  38.86,65.79 90 top
C152  2.2uF  [0402-TIGHT]  33.75,63.31 180 top
C153  4.7uF  [0402-TIGHT]  48.39,73.85 270 top
C154  2.2uF  [0402-TIGHT]  48.13,57.91 270 top
C155  2.2uF  [0402-TIGHT]  48.32,55.37 0 top
C156  2.2uF  [0402-TIGHT]  42.54,73.98 180 top
C157  0.1uF  [0402-TIGHT]  48.39,76.71 180 top
C158  0.1uF  [0402-TIGHT]  49.28,68.39 0 top
C159  2.2uF  [0402-TIGHT]  50.04,65.79 90 top
C160  2.2uF  [0402-TIGHT]  44.93,63.31 180 top
C161  4.7uF  [0402-TIGHT]  59.56,73.85 270 top
C162  2.2uF  [0402-TIGHT]  59.31,57.91 270 top
C163  2.2uF  [0402-TIGHT]  59.5,55.37 0 top
C164  2.2uF  [0402-TIGHT]  53.72,73.98 180 top
C165  0.1uF  [0402-TIGHT]  59.56,76.71 180 top
C166  0.1uF  [0402-TIGHT]  60.45,68.39 0 top
C167  2.2uF  [0402-TIGHT]  61.21,65.79 90 top
C168  2.2uF  [0402-TIGHT]  56.1,63.31 180 top
C169  4.7uF  [0402-TIGHT]  70.74,73.85 270 top
C170  2.2uF  [0402-TIGHT]  70.48,57.91 270 top
C171  2.2uF  [0402-TIGHT]  70.68,55.37 0 top
C172  2.2uF  [0402-TIGHT]  64.9,73.98 180 top
C173  0.1uF  [0402-TIGHT]  70.74,76.71 180 top
C174  0.1uF  [0402-TIGHT]  71.63,68.39 0 top
C175  2.2uF  [0402-TIGHT]  72.39,65.79 90 top
C176  2.2uF  [0402-TIGHT]  67.28,63.31 180 top
C177  4.7uF  [0402-TIGHT]  81.92,73.85 270 top
C178  2.2uF  [0402-TIGHT]  81.66,57.91 270 top
C179  2.2uF  [0402-TIGHT]  81.85,55.37 0 top
C180  2.2uF  [0402-TIGHT]  76.07,73.98 180 top
C181  0.1uF  [0402-TIGHT]  81.92,76.71 180 top
C182  0.1uF  [0402-TIGHT]  82.8,68.39 0 top
C183  2.2uF  [0402-TIGHT]  83.57,65.79 90 top
C184  2.2uF  [0402-TIGHT]  78.45,63.31 180 top
C185  4.7uF  [0402-TIGHT]  93.09,73.85 270 top
C186  2.2uF  [0402-TIGHT]  92.84,57.91 270 top
C187  2.2uF  [0402-TIGHT]  93.03,55.37 0 top
C188  2.2uF  [0402-TIGHT]  87.25,73.98 180 top
C189  0.1uF  [0402-TIGHT]  93.09,76.71 180 top
C190  0.1uF  [0402-TIGHT]  93.98,68.39 0 top
C191  2.2uF  [0402-TIGHT]  94.74,65.79 90 top
C192  2.2uF  [0402-TIGHT]  89.63,63.31 180 top
C193  4.7uF  [0402-TIGHT]  104.27,73.85 270 top
C194  2.2uF  [0402-TIGHT]  104.01,57.91 270 top
C195  2.2uF  [0402-TIGHT]  104.2,55.37 0 top
C196  2.2uF  [0402-TIGHT]  98.42,73.98 180 top
C197  0.1uF  [0402-TIGHT]  104.27,76.71 180 top
C198  0.1uF  [0402-TIGHT]  105.16,68.39 0 top
C199  2.2uF  [0402-TIGHT]  105.92,65.79 90 top
C200  2.2uF  [0402-TIGHT]  100.81,63.31 180 top
C201  4.7uF  [0402-TIGHT]  115.44,73.85 270 top
C202  2.2uF  [0402-TIGHT]  115.19,57.91 270 top
C203  2.2uF  [0402-TIGHT]  115.38,55.37 0 top
C204  2.2uF  [0402-TIGHT]  109.6,73.98 180 top
C205  0.1uF  [0402-TIGHT]  115.44,76.71 180 top
C206  0.1uF  [0402-TIGHT]  116.33,68.39 0 top
C207  2.2uF  [0402-TIGHT]  117.09,65.79 90 top
C208  2.2uF  [0402-TIGHT]  111.98,63.31 180 top
C209  4.7uF  [0402-TIGHT]  126.62,73.85 270 top
C210  2.2uF  [0402-TIGHT]  126.37,57.91 270 top
C211  2.2uF  [0402-TIGHT]  126.56,55.37 0 top
C212  2.2uF  [0402-TIGHT]  120.78,73.98 180 top
C213  0.1uF  [0402-TIGHT]  126.62,76.71 180 top
C214  0.1uF  [0402-TIGHT]  127.51,68.39 0 top
C215  2.2uF  [0402-TIGHT]  128.27,65.79 90 top
C216  2.2uF  [0402-TIGHT]  123.16,63.31 180 top
C217  4.7uF  [0402-TIGHT]  137.8,73.85 270 top
C218  2.2uF  [0402-TIGHT]  137.54,57.91 270 top
C219  2.2uF  [0402-TIGHT]  137.73,55.37 0 top
C220  2.2uF  [0402-TIGHT]  131.95,73.98 180 top
C221  0.1uF  [0402-TIGHT]  137.8,76.71 180 top
C222  0.1uF  [0402-TIGHT]  138.68,68.39 0 top
C223  2.2uF  [0402-TIGHT]  139.45,65.79 90 top
C224  2.2uF  [0402-TIGHT]  134.33,63.31 180 top
C225  4.7uF  [0402-TIGHT]  148.97,73.85 270 top
C226  2.2uF  [0402-TIGHT]  148.72,57.91 270 top
C227  2.2uF  [0402-TIGHT]  148.91,55.37 0 top
C228  2.2uF  [0402-TIGHT]  143.13,73.98 180 top
C229  0.1uF  [0402-TIGHT]  148.97,76.71 180 top
C230  0.1uF  [0402-TIGHT]  149.86,68.39 0 top
C231  2.2uF  [0402-TIGHT]  150.62,65.79 90 top
C232  2.2uF  [0402-TIGHT]  145.51,63.31 180 top
C233  4.7uF  [0402-TIGHT]  160.15,73.85 270 top
C234  2.2uF  [0402-TIGHT]  159.89,57.91 270 top
C235  2.2uF  [0402-TIGHT]  160.08,55.37 0 top
C236  2.2uF  [0402-TIGHT]  154.31,73.98 180 top
C237  0.1uF  [0402-TIGHT]  160.15,76.71 180 top
C238  0.1uF  [0402-TIGHT]  161.04,68.39 0 top
C239  2.2uF  [0402-TIGHT]  161.8,65.79 90 top
C240  2.2uF  [0402-TIGHT]  156.69,63.31 180 top
C241  4.7uF  [0402-TIGHT]  171.32,73.85 270 top
C242  2.2uF  [0402-TIGHT]  171.07,57.91 270 top
C243  2.2uF  [0402-TIGHT]  171.26,55.37 0 top
C244  2.2uF  [0402-TIGHT]  165.48,73.98 180 top
C245  0.1uF  [0402-TIGHT]  171.32,76.71 180 top
C246  0.1uF  [0402-TIGHT]  172.21,68.39 0 top
C247  2.2uF  [0402-TIGHT]  172.97,65.79 90 top
C248  2.2uF  [0402-TIGHT]  167.86,63.31 180 top
C249  4.7uF  [0402-TIGHT]  182.5,73.85 270 top
C250  2.2uF  [0402-TIGHT]  182.25,57.91 270 top
C251  2.2uF  [0402-TIGHT]  182.44,55.37 0 top
C252  2.2uF  [0402-TIGHT]  176.66,73.98 180 top
C253  0.1uF  [0402-TIGHT]  182.5,76.71 180 top
C254  0.1uF  [0402-TIGHT]  183.39,68.39 0 top
C255  2.2uF  [0402-TIGHT]  184.15,65.79 90 top
C256  2.2uF  [0402-TIGHT]  179.04,63.31 180 top
C257  4.7uF  [0402-TIGHT]  14.86,115 270 top
C258  2.2uF  [0402-TIGHT]  14.61,99.06 270 top
C259  2.2uF  [0402-TIGHT]  14.8,96.52 0 top
C260  2.2uF  [0402-TIGHT]  9.02,115.13 180 top
C261  0.1uF  [0402-TIGHT]  14.86,117.86 180 top
C262  0.1uF  [0402-TIGHT]  15.75,109.54 0 top
C263  2.2uF  [0402-TIGHT]  16.51,106.93 90 top
C264  2.2uF  [0402-TIGHT]  11.4,104.46 180 top
C265  4.7uF  [0402-TIGHT]  26.04,115 270 top
C266  2.2uF  [0402-TIGHT]  25.78,99.06 270 top
C267  2.2uF  [0402-TIGHT]  25.97,96.52 0 top
C268  2.2uF  [0402-TIGHT]  20.19,115.13 180 top
C269  0.1uF  [0402-TIGHT]  26.04,117.86 180 top
C270  0.1uF  [0402-TIGHT]  26.92,109.54 0 top
C271  2.2uF  [0402-TIGHT]  27.69,106.93 90 top
C272  2.2uF  [0402-TIGHT]  22.57,104.46 180 top
C273  4.7uF  [0402-TIGHT]  37.21,115 270 top
C274  2.2uF  [0402-TIGHT]  36.96,99.06 270 top
C275  2.2uF  [0402-TIGHT]  37.15,96.52 0 top
C276  2.2uF  [0402-TIGHT]  31.37,115.13 180 top
C277  0.1uF  [0402-TIGHT]  37.21,117.86 180 top
C278  0.1uF  [0402-TIGHT]  38.1,109.54 0 top
C279  2.2uF  [0402-TIGHT]  38.86,106.93 90 top
C280  2.2uF  [0402-TIGHT]  33.75,104.46 180 top
C281  4.7uF  [0402-TIGHT]  48.39,115 270 top
C282  2.2uF  [0402-TIGHT]  48.13,99.06 270 top
C283  2.2uF  [0402-TIGHT]  48.32,96.52 0 top
C284  2.2uF  [0402-TIGHT]  42.54,115.13 180 top
C285  0.1uF  [0402-TIGHT]  48.39,117.86 180 top
C286  0.1uF  [0402-TIGHT]  49.28,109.54 0 top
C287  2.2uF  [0402-TIGHT]  50.04,106.93 90 top
C288  2.2uF  [0402-TIGHT]  44.93,104.46 180 top
C289  4.7uF  [0402-TIGHT]  59.56,115 270 top
C290  2.2uF  [0402-TIGHT]  59.31,99.06 270 top
C291  2.2uF  [0402-TIGHT]  59.5,96.52 0 top
C292  2.2uF  [0402-TIGHT]  53.72,115.13 180 top
C293  0.1uF  [0402-TIGHT]  59.56,117.86 180 top
C294  0.1uF  [0402-TIGHT]  60.45,109.54 0 top
C295  2.2uF  [0402-TIGHT]  61.21,106.93 90 top
C296  2.2uF  [0402-TIGHT]  56.1,104.46 180 top
C297  4.7uF  [0402-TIGHT]  70.74,115 270 top
C298  2.2uF  [0402-TIGHT]  70.48,99.06 270 top
C299  2.2uF  [0402-TIGHT]  70.68,96.52 0 top
C300  2.2uF  [0402-TIGHT]  64.9,115.13 180 top
C301  0.1uF  [0402-TIGHT]  70.74,117.86 180 top
C302  0.1uF  [0402-TIGHT]  71.63,109.54 0 top
C303  2.2uF  [0402-TIGHT]  72.39,106.93 90 top
C304  2.2uF  [0402-TIGHT]  67.28,104.46 180 top
C305  4.7uF  [0402-TIGHT]  81.92,115 270 top
C306  2.2uF  [0402-TIGHT]  81.66,99.06 270 top
C307  2.2uF  [0402-TIGHT]  81.85,96.52 0 top
C308  2.2uF  [0402-TIGHT]  76.07,115.13 180 top
C309  0.1uF  [0402-TIGHT]  81.92,117.86 180 top
C310  0.1uF  [0402-TIGHT]  82.8,109.54 0 top
C311  2.2uF  [0402-TIGHT]  83.57,106.93 90 top
C312  2.2uF  [0402-TIGHT]  78.45,104.46 180 top
C313  4.7uF  [0402-TIGHT]  93.09,115 270 top
C314  2.2uF  [0402-TIGHT]  92.84,99.06 270 top
C315  2.2uF  [0402-TIGHT]  93.03,96.52 0 top
C316  2.2uF  [0402-TIGHT]  87.25,115.13 180 top
C317  0.1uF  [0402-TIGHT]  93.09,117.86 180 top
C318  0.1uF  [0402-TIGHT]  93.98,109.54 0 top
C319  2.2uF  [0402-TIGHT]  94.74,106.93 90 top
C320  2.2uF  [0402-TIGHT]  89.63,104.46 180 top
C321  4.7uF  [0402-TIGHT]  104.27,115 270 top
C322  2.2uF  [0402-TIGHT]  104.01,99.06 270 top
C323  2.2uF  [0402-TIGHT]  104.2,96.52 0 top
C324  2.2uF  [0402-TIGHT]  98.42,115.13 180 top
C325  0.1uF  [0402-TIGHT]  104.27,117.86 180 top
C326  0.1uF  [0402-TIGHT]  105.16,109.54 0 top
C327  2.2uF  [0402-TIGHT]  105.92,106.93 90 top
C328  2.2uF  [0402-TIGHT]  100.81,104.46 180 top
C329  4.7uF  [0402-TIGHT]  115.44,115 270 top
C330  2.2uF  [0402-TIGHT]  115.19,99.06 270 top
C331  2.2uF  [0402-TIGHT]  115.38,96.52 0 top
C332  2.2uF  [0402-TIGHT]  109.6,115.13 180 top
C333  0.1uF  [0402-TIGHT]  115.44,117.86 180 top
C334  0.1uF  [0402-TIGHT]  116.33,109.54 0 top
C335  2.2uF  [0402-TIGHT]  117.09,106.93 90 top
C336  2.2uF  [0402-TIGHT]  111.98,104.46 180 top
C337  4.7uF  [0402-TIGHT]  126.62,115 270 top
C338  2.2uF  [0402-TIGHT]  126.37,99.06 270 top
C339  2.2uF  [0402-TIGHT]  126.56,96.52 0 top
C340  2.2uF  [0402-TIGHT]  120.78,115.13 180 top
C341  0.1uF  [0402-TIGHT]  126.62,117.86 180 top
C342  0.1uF  [0402-TIGHT]  127.51,109.54 0 top
C343  2.2uF  [0402-TIGHT]  128.27,106.93 90 top
C344  2.2uF  [0402-TIGHT]  123.16,104.46 180 top
C345  4.7uF  [0402-TIGHT]  137.8,115 270 top
C346  2.2uF  [0402-TIGHT]  137.54,99.06 270 top
C347  2.2uF  [0402-TIGHT]  137.73,96.52 0 top
C348  2.2uF  [0402-TIGHT]  131.95,115.13 180 top
C349  0.1uF  [0402-TIGHT]  137.8,117.86 180 top
C350  0.1uF  [0402-TIGHT]  138.68,109.54 0 top
C351  2.2uF  [0402-TIGHT]  139.45,106.93 90 top
C352  2.2uF  [0402-TIGHT]  134.33,104.46 180 top
C353  4.7uF  [0402-TIGHT]  148.97,115 270 top
C354  2.2uF  [0402-TIGHT]  148.72,99.06 270 top
C355  2.2uF  [0402-TIGHT]  148.91,96.52 0 top
C356  2.2uF  [0402-TIGHT]  143.13,115.13 180 top
C357  0.1uF  [0402-TIGHT]  148.97,117.86 180 top
C358  0.1uF  [0402-TIGHT]  149.86,109.54 0 top
C359  2.2uF  [0402-TIGHT]  150.62,106.93 90 top
C360  2.2uF  [0402-TIGHT]  145.51,104.46 180 top
C361  4.7uF  [0402-TIGHT]  160.15,115 270 top
C362  2.2uF  [0402-TIGHT]  159.89,99.06 270 top
C363  2.2uF  [0402-TIGHT]  160.08,96.52 0 top
C364  2.2uF  [0402-TIGHT]  154.31,115.13 180 top
C365  0.1uF  [0402-TIGHT]  160.15,117.86 180 top
C366  0.1uF  [0402-TIGHT]  161.04,109.54 0 top
C367  2.2uF  [0402-TIGHT]  161.8,106.93 90 top
C368  2.2uF  [0402-TIGHT]  156.69,104.46 180 top
C369  4.7uF  [0402-TIGHT]  171.32,115 270 top
C370  2.2uF  [0402-TIGHT]  171.07,99.06 270 top
C371  2.2uF  [0402-TIGHT]  171.26,96.52 0 top
C372  2.2uF  [0402-TIGHT]  165.48,115.13 180 top
C373  0.1uF  [0402-TIGHT]  171.32,117.86 180 top
C374  0.1uF  [0402-TIGHT]  172.21,109.54 0 top
C375  2.2uF  [0402-TIGHT]  172.97,106.93 90 top
C376  2.2uF  [0402-TIGHT]  167.86,104.46 180 top
C377  4.7uF  [0402-TIGHT]  182.5,115 270 top
C378  2.2uF  [0402-TIGHT]  182.25,99.06 270 top
C379  2.2uF  [0402-TIGHT]  182.44,96.52 0 top
C380  2.2uF  [0402-TIGHT]  176.66,115.13 180 top
C381  0.1uF  [0402-TIGHT]  182.5,117.86 180 top
C382  0.1uF  [0402-TIGHT]  183.39,109.54 0 top
C383  2.2uF  [0402-TIGHT]  184.15,106.93 90 top
C384  2.2uF  [0402-TIGHT]  179.04,104.46 180 top
D1  Yellow  [LED-0603]  8.64,31.69 180 top
D2  1A/23V/620mV  [SOD-323]  8.7,35.12 180 top
D3  Yellow  [LED-0603]  19.81,31.69 180 top
D4  1A/23V/620mV  [SOD-323]  19.88,35.12 180 top
D5  Yellow  [LED-0603]  30.99,31.69 180 top
D6  1A/23V/620mV  [SOD-323]  31.05,35.12 180 top
D7  Yellow  [LED-0603]  42.16,31.69 180 top
D8  1A/23V/620mV  [SOD-323]  42.23,35.12 180 top
D9  Yellow  [LED-0603]  53.34,31.69 180 top
D10  1A/23V/620mV  [SOD-323]  53.4,35.12 180 top
D11  Yellow  [LED-0603]  64.52,31.69 180 top
D12  1A/23V/620mV  [SOD-323]  64.58,35.12 180 top
D13  Yellow  [LED-0603]  75.69,31.69 180 top
D14  1A/23V/620mV  [SOD-323]  75.76,35.12 180 top
D15  Yellow  [LED-0603]  86.87,31.69 180 top
D16  1A/23V/620mV  [SOD-323]  86.93,35.12 180 top
D17  Yellow  [LED-0603]  98.04,31.69 180 top
D18  1A/23V/620mV  [SOD-323]  98.11,35.12 180 top
D19  Yellow  [LED-0603]  109.22,31.69 180 top
D20  1A/23V/620mV  [SOD-323]  109.28,35.12 180 top
D21  Yellow  [LED-0603]  120.4,31.69 180 top
D22  1A/23V/620mV  [SOD-323]  120.46,35.12 180 top
D23  Yellow  [LED-0603]  131.57,31.69 180 top
D24  1A/23V/620mV  [SOD-323]  131.64,35.12 180 top
D25  Yellow  [LED-0603]  142.75,31.69 180 top
D26  1A/23V/620mV  [SOD-323]  142.81,35.12 180 top
D27  Yellow  [LED-0603]  153.92,31.69 180 top
D28  1A/23V/620mV  [SOD-323]  153.99,35.12 180 top
D29  Yellow  [LED-0603]  165.1,31.69 180 top
D30  1A/23V/620mV  [SOD-323]  165.16,35.12 180 top
D31  Yellow  [LED-0603]  176.28,31.69 180 top
D32  1A/23V/620mV  [SOD-323]  176.34,35.12 180 top
D33  Yellow  [LED-0603]  8.64,72.83 180 top
D34  1A/23V/620mV  [SOD-323]  8.7,76.26 180 top
D35  Yellow  [LED-0603]  19.81,72.83 180 top
D36  1A/23V/620mV  [SOD-323]  19.88,76.26 180 top
D37  Yellow  [LED-0603]  30.99,72.83 180 top
D38  1A/23V/620mV  [SOD-323]  31.05,76.26 180 top
D39  Yellow  [LED-0603]  42.16,72.83 180 top
D40  1A/23V/620mV  [SOD-323]  42.23,76.26 180 top
D41  Yellow  [LED-0603]  53.34,72.83 180 top
D42  1A/23V/620mV  [SOD-323]  53.4,76.26 180 top
D43  Yellow  [LED-0603]  64.52,72.83 180 top
D44  1A/23V/620mV  [SOD-323]  64.58,76.26 180 top
D45  Yellow  [LED-0603]  75.69,72.83 180 top
D46  1A/23V/620mV  [SOD-323]  75.76,76.26 180 top
D47  Yellow  [LED-0603]  86.87,72.83 180 top
D48  1A/23V/620mV  [SOD-323]  86.93,76.26 180 top
D49  Yellow  [LED-0603]  98.04,72.83 180 top
D50  1A/23V/620mV  [SOD-323]  98.11,76.26 180 top
D51  Yellow  [LED-0603]  109.22,72.83 180 top
D52  1A/23V/620mV  [SOD-323]  109.28,76.26 180 top
D53  Yellow  [LED-0603]  120.4,72.83 180 top
D54  1A/23V/620mV  [SOD-323]  120.46,76.26 180 top
D55  Yellow  [LED-0603]  131.57,72.83 180 top
D56  1A/23V/620mV  [SOD-323]  131.64,76.26 180 top
D57  Yellow  [LED-0603]  142.75,72.83 180 top
D58  1A/23V/620mV  [SOD-323]  142.81,76.26 180 top
D59  Yellow  [LED-0603]  153.92,72.83 180 top
D60  1A/23V/620mV  [SOD-323]  153.99,76.26 180 top
D61  Yellow  [LED-0603]  165.1,72.83 180 top
D62  1A/23V/620mV  [SOD-323]  165.16,76.26 180 top
D63  Yellow  [LED-0603]  176.28,72.83 180 top
D64  1A/23V/620mV  [SOD-323]  176.34,76.26 180 top
D65  Yellow  [LED-0603]  8.64,113.98 180 top
D66  1A/23V/620mV  [SOD-323]  8.7,117.41 180 top
D67  Yellow  [LED-0603]  19.81,113.98 180 top
D68  1A/23V/620mV  [SOD-323]  19.88,117.41 180 top
D69  Yellow  [LED-0603]  30.99,113.98 180 top
D70  1A/23V/620mV  [SOD-323]  31.05,117.41 180 top
D71  Yellow  [LED-0603]  42.16,113.98 180 top
D72  1A/23V/620mV  [SOD-323]  42.23,117.41 180 top
D73  Yellow  [LED-0603]  53.34,113.98 180 top
D74  1A/23V/620mV  [SOD-323]  53.4,117.41 180 top
D75  Yellow  [LED-0603]  64.52,113.98 180 top
D76  1A/23V/620mV  [SOD-323]  64.58,117.41 180 top
D77  Yellow  [LED-0603]  75.69,113.98 180 top
D78  1A/23V/620mV  [SOD-323]  75.76,117.41 180 top
D79  Yellow  [LED-0603]  86.87,113.98 180 top
D80  1A/23V/620mV  [SOD-323]  86.93,117.41 180 top
D81  Yellow  [LED-0603]  98.04,113.98 180 top
D82  1A/23V/620mV  [SOD-323]  98.11,117.41 180 top
D83  Yellow  [LED-0603]  109.22,113.98 180 top
D84  1A/23V/620mV  [SOD-323]  109.28,117.41 180 top
D85  Yellow  [LED-0603]  120.4,113.98 180 top
D86  1A/23V/620mV  [SOD-323]  120.46,117.41 180 top
D87  Yellow  [LED-0603]  131.57,113.98 180 top
D88  1A/23V/620mV  [SOD-323]  131.64,117.41 180 top
D89  Yellow  [LED-0603]  142.75,113.98 180 top
D90  1A/23V/620mV  [SOD-323]  142.81,117.41 180 top
D91  Yellow  [LED-0603]  153.92,113.98 180 top
D92  1A/23V/620mV  [SOD-323]  153.99,117.41 180 top
D93  Yellow  [LED-0603]  165.1,113.98 180 top
D94  1A/23V/620mV  [SOD-323]  165.16,117.41 180 top
D95  Yellow  [LED-0603]  176.28,113.98 180 top
D96  1A/23V/620mV  [SOD-323]  176.34,117.41 180 top
E$1  [FIDUCIAL-1X2]  13.72,131.89 0 top
E$2  [FIDUCIAL-1X2]  13.72,131.89 0 bottom
E$3  [FIDUCIAL-1X2]  178.24,131.89 0 top
E$4  [FIDUCIAL-1X2]  178.24,131.89 0 bottom
E$5  [FIDUCIAL-1.5X3]  13.72,4.76 0 top
E$6  [FIDUCIAL-1.5X3]  13.72,4.76 0 bottom
FD1  FIDUCIALUFIDUCIAL  [FIDUCIAL-MICRO]  7.49,46.86 0 top
FD2  FIDUCIALUFIDUCIAL  [FIDUCIAL-MICRO]  7.49,46.86 0 bottom
FD3  FIDUCIALUFIDUCIAL  [FIDUCIAL-MICRO]  16.89,7.49 0 top
FD4  FIDUCIALUFIDUCIAL  [FIDUCIAL-MICRO]  16.89,7.49 0 bottom
FD5  FIDUCIALUFIDUCIAL  [FIDUCIAL-MICRO]  18.67,46.86 0 top
FD6  FIDUCIALUFIDUCIAL  [FIDUCIAL-MICRO]  18.67,46.86 0 bottom
FD7  FIDUCIALUFIDUCIAL  [FIDUCIAL-MICRO]  28.07,7.49 0 top
FD8  FIDUCIALUFIDUCIAL  [FIDUCIAL-MICRO]  28.07,7.49 0 bottom
FD9  FIDUCIALUFIDUCIAL  [FIDUCIAL-MICRO]  29.84,46.86 0 top
FD10  FIDUCIALUFIDUCIAL  [FIDUCIAL-MICRO]  29.84,46.86 0 bottom
FD11  FIDUCIALUFIDUCIAL  [FIDUCIAL-MICRO]  39.24,7.49 0 top
FD12  FIDUCIALUFIDUCIAL  [FIDUCIAL-MICRO]  39.24,7.49 0 bottom
FD13  FIDUCIALUFIDUCIAL  [FIDUCIAL-MICRO]  41.02,46.86 0 top
FD14  FIDUCIALUFIDUCIAL  [FIDUCIAL-MICRO]  41.02,46.86 0 bottom
FD15  FIDUCIALUFIDUCIAL  [FIDUCIAL-MICRO]  50.42,7.49 0 top
FD16  FIDUCIALUFIDUCIAL  [FIDUCIAL-MICRO]  50.42,7.49 0 bottom
FD17  FIDUCIALUFIDUCIAL  [FIDUCIAL-MICRO]  52.2,46.86 0 top
FD18  FIDUCIALUFIDUCIAL  [FIDUCIAL-MICRO]  52.2,46.86 0 bottom
FD19  FIDUCIALUFIDUCIAL  [FIDUCIAL-MICRO]  61.59,7.49 0 top
FD20  FIDUCIALUFIDUCIAL  [FIDUCIAL-MICRO]  61.59,7.49 0 bottom
FD21  FIDUCIALUFIDUCIAL  [FIDUCIAL-MICRO]  63.37,46.86 0 top
FD22  FIDUCIALUFIDUCIAL  [FIDUCIAL-MICRO]  63.37,46.86 0 bottom
FD23  FIDUCIALUFIDUCIAL  [FIDUCIAL-MICRO]  72.77,7.49 0 top
FD24  FIDUCIALUFIDUCIAL  [FIDUCIAL-MICRO]  72.77,7.49 0 bottom
FD25  FIDUCIALUFIDUCIAL  [FIDUCIAL-MICRO]  74.55,46.86 0 top
FD26  FIDUCIALUFIDUCIAL  [FIDUCIAL-MICRO]  74.55,46.86 0 bottom
FD27  FIDUCIALUFIDUCIAL  [FIDUCIAL-MICRO]  83.95,7.49 0 top
FD28  FIDUCIALUFIDUCIAL  [FIDUCIAL-MICRO]  83.95,7.49 0 bottom
FD29  FIDUCIALUFIDUCIAL  [FIDUCIAL-MICRO]  85.73,46.86 0 top
FD30  FIDUCIALUFIDUCIAL  [FIDUCIAL-MICRO]  85.73,46.86 0 bottom
FD31  FIDUCIALUFIDUCIAL  [FIDUCIAL-MICRO]  95.12,7.49 0 top
FD32  FIDUCIALUFIDUCIAL  [FIDUCIAL-MICRO]  95.12,7.49 0 bottom
FD33  FIDUCIALUFIDUCIAL  [FIDUCIAL-MICRO]  96.9,46.86 0 top
FD34  FIDUCIALUFIDUCIAL  [FIDUCIAL-MICRO]  96.9,46.86 0 bottom
FD35  FIDUCIALUFIDUCIAL  [FIDUCIAL-MICRO]  106.3,7.49 0 top
FD36  FIDUCIALUFIDUCIAL  [FIDUCIAL-MICRO]  106.3,7.49 0 bottom
FD37  FIDUCIALUFIDUCIAL  [FIDUCIAL-MICRO]  108.08,46.86 0 top
FD38  FIDUCIALUFIDUCIAL  [FIDUCIAL-MICRO]  108.08,46.86 0 bottom
FD39  FIDUCIALUFIDUCIAL  [FIDUCIAL-MICRO]  117.48,7.49 0 top
FD40  FIDUCIALUFIDUCIAL  [FIDUCIAL-MICRO]  117.48,7.49 0 bottom
FD41  FIDUCIALUFIDUCIAL  [FIDUCIAL-MICRO]  119.25,46.86 0 top
FD42  FIDUCIALUFIDUCIAL  [FIDUCIAL-MICRO]  119.25,46.86 0 bottom
FD43  FIDUCIALUFIDUCIAL  [FIDUCIAL-MICRO]  128.65,7.49 0 top
FD44  FIDUCIALUFIDUCIAL  [FIDUCIAL-MICRO]  128.65,7.49 0 bottom
FD45  FIDUCIALUFIDUCIAL  [FIDUCIAL-MICRO]  130.43,46.86 0 top
FD46  FIDUCIALUFIDUCIAL  [FIDUCIAL-MICRO]  130.43,46.86 0 bottom
FD47  FIDUCIALUFIDUCIAL  [FIDUCIAL-MICRO]  139.83,7.49 0 top
FD48  FIDUCIALUFIDUCIAL  [FIDUCIAL-MICRO]  139.83,7.49 0 bottom
FD49  FIDUCIALUFIDUCIAL  [FIDUCIAL-MICRO]  141.61,46.86 0 top
FD50  FIDUCIALUFIDUCIAL  [FIDUCIAL-MICRO]  141.61,46.86 0 bottom
FD51  FIDUCIALUFIDUCIAL  [FIDUCIAL-MICRO]  151,7.49 0 top
FD52  FIDUCIALUFIDUCIAL  [FIDUCIAL-MICRO]  151,7.49 0 bottom
FD53  FIDUCIALUFIDUCIAL  [FIDUCIAL-MICRO]  152.78,46.86 0 top
FD54  FIDUCIALUFIDUCIAL  [FIDUCIAL-MICRO]  152.78,46.86 0 bottom
FD55  FIDUCIALUFIDUCIAL  [FIDUCIAL-MICRO]  162.18,7.49 0 top
FD56  FIDUCIALUFIDUCIAL  [FIDUCIAL-MICRO]  162.18,7.49 0 bottom
FD57  FIDUCIALUFIDUCIAL  [FIDUCIAL-MICRO]  163.96,46.86 0 top
FD58  FIDUCIALUFIDUCIAL  [FIDUCIAL-MICRO]  163.96,46.86 0 bottom
FD59  FIDUCIALUFIDUCIAL  [FIDUCIAL-MICRO]  173.36,7.49 0 top
FD60  FIDUCIALUFIDUCIAL  [FIDUCIAL-MICRO]  173.36,7.49 0 bottom
FD61  FIDUCIALUFIDUCIAL  [FIDUCIAL-MICRO]  175.13,46.86 0 top
FD62  FIDUCIALUFIDUCIAL  [FIDUCIAL-MICRO]  175.13,46.86 0 bottom
FD63  FIDUCIALUFIDUCIAL  [FIDUCIAL-MICRO]  184.53,7.49 0 top
FD64  FIDUCIALUFIDUCIAL  [FIDUCIAL-MICRO]  184.53,7.49 0 bottom
FD65  FIDUCIALUFIDUCIAL  [FIDUCIAL-MICRO]  7.49,88.01 0 top
FD66  FIDUCIALUFIDUCIAL  [FIDUCIAL-MICRO]  7.49,88.01 0 bottom
FD67  FIDUCIALUFIDUCIAL  [FIDUCIAL-MICRO]  16.89,48.64 0 top
FD68  FIDUCIALUFIDUCIAL  [FIDUCIAL-MICRO]  16.89,48.64 0 bottom
FD69  FIDUCIALUFIDUCIAL  [FIDUCIAL-MICRO]  18.67,88.01 0 top
FD70  FIDUCIALUFIDUCIAL  [FIDUCIAL-MICRO]  18.67,88.01 0 bottom
FD71  FIDUCIALUFIDUCIAL  [FIDUCIAL-MICRO]  28.07,48.64 0 top
FD72  FIDUCIALUFIDUCIAL  [FIDUCIAL-MICRO]  28.07,48.64 0 bottom
FD73  FIDUCIALUFIDUCIAL  [FIDUCIAL-MICRO]  29.84,88.01 0 top
FD74  FIDUCIALUFIDUCIAL  [FIDUCIAL-MICRO]  29.84,88.01 0 bottom
FD75  FIDUCIALUFIDUCIAL  [FIDUCIAL-MICRO]  39.24,48.64 0 top
FD76  FIDUCIALUFIDUCIAL  [FIDUCIAL-MICRO]  39.24,48.64 0 bottom
FD77  FIDUCIALUFIDUCIAL  [FIDUCIAL-MICRO]  41.02,88.01 0 top
FD78  FIDUCIALUFIDUCIAL  [FIDUCIAL-MICRO]  41.02,88.01 0 bottom
FD79  FIDUCIALUFIDUCIAL  [FIDUCIAL-MICRO]  50.42,48.64 0 top
FD80  FIDUCIALUFIDUCIAL  [FIDUCIAL-MICRO]  50.42,48.64 0 bottom
FD81  FIDUCIALUFIDUCIAL  [FIDUCIAL-MICRO]  52.2,88.01 0 top
FD82  FIDUCIALUFIDUCIAL  [FIDUCIAL-MICRO]  52.2,88.01 0 bottom
FD83  FIDUCIALUFIDUCIAL  [FIDUCIAL-MICRO]  61.59,48.64 0 top
FD84  FIDUCIALUFIDUCIAL  [FIDUCIAL-MICRO]  61.59,48.64 0 bottom
FD85  FIDUCIALUFIDUCIAL  [FIDUCIAL-MICRO]  63.37,88.01 0 top
FD86  FIDUCIALUFIDUCIAL  [FIDUCIAL-MICRO]  63.37,88.01 0 bottom
FD87  FIDUCIALUFIDUCIAL  [FIDUCIAL-MICRO]  72.77,48.64 0 top
FD88  FIDUCIALUFIDUCIAL  [FIDUCIAL-MICRO]  72.77,48.64 0 bottom
FD89  FIDUCIALUFIDUCIAL  [FIDUCIAL-MICRO]  74.55,88.01 0 top
FD90  FIDUCIALUFIDUCIAL  [FIDUCIAL-MICRO]  74.55,88.01 0 bottom
FD91  FIDUCIALUFIDUCIAL  [FIDUCIAL-MICRO]  83.95,48.64 0 top
FD92  FIDUCIALUFIDUCIAL  [FIDUCIAL-MICRO]  83.95,48.64 0 bottom
FD93  FIDUCIALUFIDUCIAL  [FIDUCIAL-MICRO]  85.73,88.01 0 top
FD94  FIDUCIALUFIDUCIAL  [FIDUCIAL-MICRO]  85.73,88.01 0 bottom
FD95  FIDUCIALUFIDUCIAL  [FIDUCIAL-MICRO]  95.12,48.64 0 top
FD96  FIDUCIALUFIDUCIAL  [FIDUCIAL-MICRO]  95.12,48.64 0 bottom
FD97  FIDUCIALUFIDUCIAL  [FIDUCIAL-MICRO]  96.9,88.01 0 top
FD98  FIDUCIALUFIDUCIAL  [FIDUCIAL-MICRO]  96.9,88.01 0 bottom
FD99  FIDUCIALUFIDUCIAL  [FIDUCIAL-MICRO]  106.3,48.64 0 top
FD100  FIDUCIALUFIDUCIAL  [FIDUCIAL-MICRO]  106.3,48.64 0 bottom
FD101  FIDUCIALUFIDUCIAL  [FIDUCIAL-MICRO]  108.08,88.01 0 top
FD102  FIDUCIALUFIDUCIAL  [FIDUCIAL-MICRO]  108.08,88.01 0 bottom
FD103  FIDUCIALUFIDUCIAL  [FIDUCIAL-MICRO]  117.48,48.64 0 top
FD104  FIDUCIALUFIDUCIAL  [FIDUCIAL-MICRO]  117.48,48.64 0 bottom
FD105  FIDUCIALUFIDUCIAL  [FIDUCIAL-MICRO]  119.25,88.01 0 top
FD106  FIDUCIALUFIDUCIAL  [FIDUCIAL-MICRO]  119.25,88.01 0 bottom
FD107  FIDUCIALUFIDUCIAL  [FIDUCIAL-MICRO]  128.65,48.64 0 top
FD108  FIDUCIALUFIDUCIAL  [FIDUCIAL-MICRO]  128.65,48.64 0 bottom
FD109  FIDUCIALUFIDUCIAL  [FIDUCIAL-MICRO]  130.43,88.01 0 top
FD110  FIDUCIALUFIDUCIAL  [FIDUCIAL-MICRO]  130.43,88.01 0 bottom
FD111  FIDUCIALUFIDUCIAL  [FIDUCIAL-MICRO]  139.83,48.64 0 top
FD112  FIDUCIALUFIDUCIAL  [FIDUCIAL-MICRO]  139.83,48.64 0 bottom
FD113  FIDUCIALUFIDUCIAL  [FIDUCIAL-MICRO]  141.61,88.01 0 top
FD114  FIDUCIALUFIDUCIAL  [FIDUCIAL-MICRO]  141.61,88.01 0 bottom
FD115  FIDUCIALUFIDUCIAL  [FIDUCIAL-MICRO]  151,48.64 0 top
FD116  FIDUCIALUFIDUCIAL  [FIDUCIAL-MICRO]  151,48.64 0 bottom
FD117  FIDUCIALUFIDUCIAL  [FIDUCIAL-MICRO]  152.78,88.01 0 top
FD118  FIDUCIALUFIDUCIAL  [FIDUCIAL-MICRO]  152.78,88.01 0 bottom
FD119  FIDUCIALUFIDUCIAL  [FIDUCIAL-MICRO]  162.18,48.64 0 top
FD120  FIDUCIALUFIDUCIAL  [FIDUCIAL-MICRO]  162.18,48.64 0 bottom
FD121  FIDUCIALUFIDUCIAL  [FIDUCIAL-MICRO]  163.96,88.01 0 top
FD122  FIDUCIALUFIDUCIAL  [FIDUCIAL-MICRO]  163.96,88.01 0 bottom
FD123  FIDUCIALUFIDUCIAL  [FIDUCIAL-MICRO]  173.36,48.64 0 top
FD124  FIDUCIALUFIDUCIAL  [FIDUCIAL-MICRO]  173.36,48.64 0 bottom
FD125  FIDUCIALUFIDUCIAL  [FIDUCIAL-MICRO]  175.13,88.01 0 top
FD126  FIDUCIALUFIDUCIAL  [FIDUCIAL-MICRO]  175.13,88.01 0 bottom
FD127  FIDUCIALUFIDUCIAL  [FIDUCIAL-MICRO]  184.53,48.64 0 top
FD128  FIDUCIALUFIDUCIAL  [FIDUCIAL-MICRO]  184.53,48.64 0 bottom
FD129  FIDUCIALUFIDUCIAL  [FIDUCIAL-MICRO]  7.49,129.16 0 top
FD130  FIDUCIALUFIDUCIAL  [FIDUCIAL-MICRO]  7.49,129.16 0 bottom
FD131  FIDUCIALUFIDUCIAL  [FIDUCIAL-MICRO]  16.89,89.79 0 top
FD132  FIDUCIALUFIDUCIAL  [FIDUCIAL-MICRO]  16.89,89.79 0 bottom
FD133  FIDUCIALUFIDUCIAL  [FIDUCIAL-MICRO]  18.67,129.16 0 top
FD134  FIDUCIALUFIDUCIAL  [FIDUCIAL-MICRO]  18.67,129.16 0 bottom
FD135  FIDUCIALUFIDUCIAL  [FIDUCIAL-MICRO]  28.07,89.79 0 top
FD136  FIDUCIALUFIDUCIAL  [FIDUCIAL-MICRO]  28.07,89.79 0 bottom
FD137  FIDUCIALUFIDUCIAL  [FIDUCIAL-MICRO]  29.84,129.16 0 top
FD138  FIDUCIALUFIDUCIAL  [FIDUCIAL-MICRO]  29.84,129.16 0 bottom
FD139  FIDUCIALUFIDUCIAL  [FIDUCIAL-MICRO]  39.24,89.79 0 top
FD140  FIDUCIALUFIDUCIAL  [FIDUCIAL-MICRO]  39.24,89.79 0 bottom
FD141  FIDUCIALUFIDUCIAL  [FIDUCIAL-MICRO]  41.02,129.16 0 top
FD142  FIDUCIALUFIDUCIAL  [FIDUCIAL-MICRO]  41.02,129.16 0 bottom
FD143  FIDUCIALUFIDUCIAL  [FIDUCIAL-MICRO]  50.42,89.79 0 top
FD144  FIDUCIALUFIDUCIAL  [FIDUCIAL-MICRO]  50.42,89.79 0 bottom
FD145  FIDUCIALUFIDUCIAL  [FIDUCIAL-MICRO]  52.2,129.16 0 top
FD146  FIDUCIALUFIDUCIAL  [FIDUCIAL-MICRO]  52.2,129.16 0 bottom
FD147  FIDUCIALUFIDUCIAL  [FIDUCIAL-MICRO]  61.59,89.79 0 top
FD148  FIDUCIALUFIDUCIAL  [FIDUCIAL-MICRO]  61.59,89.79 0 bottom
FD149  FIDUCIALUFIDUCIAL  [FIDUCIAL-MICRO]  63.37,129.16 0 top
FD150  FIDUCIALUFIDUCIAL  [FIDUCIAL-MICRO]  63.37,129.16 0 bottom
FD151  FIDUCIALUFIDUCIAL  [FIDUCIAL-MICRO]  72.77,89.79 0 top
FD152  FIDUCIALUFIDUCIAL  [FIDUCIAL-MICRO]  72.77,89.79 0 bottom
FD153  FIDUCIALUFIDUCIAL  [FIDUCIAL-MICRO]  74.55,129.16 0 top
FD154  FIDUCIALUFIDUCIAL  [FIDUCIAL-MICRO]  74.55,129.16 0 bottom
FD155  FIDUCIALUFIDUCIAL  [FIDUCIAL-MICRO]  83.95,89.79 0 top
FD156  FIDUCIALUFIDUCIAL  [FIDUCIAL-MICRO]  83.95,89.79 0 bottom
FD157  FIDUCIALUFIDUCIAL  [FIDUCIAL-MICRO]  85.73,129.16 0 top
FD158  FIDUCIALUFIDUCIAL  [FIDUCIAL-MICRO]  85.73,129.16 0 bottom
FD159  FIDUCIALUFIDUCIAL  [FIDUCIAL-MICRO]  95.12,89.79 0 top
FD160  FIDUCIALUFIDUCIAL  [FIDUCIAL-MICRO]  95.12,89.79 0 bottom
FD161  FIDUCIALUFIDUCIAL  [FIDUCIAL-MICRO]  96.9,129.16 0 top
FD162  FIDUCIALUFIDUCIAL  [FIDUCIAL-MICRO]  96.9,129.16 0 bottom
FD163  FIDUCIALUFIDUCIAL  [FIDUCIAL-MICRO]  106.3,89.79 0 top
FD164  FIDUCIALUFIDUCIAL  [FIDUCIAL-MICRO]  106.3,89.79 0 bottom
FD165  FIDUCIALUFIDUCIAL  [FIDUCIAL-MICRO]  108.08,129.16 0 top
FD166  FIDUCIALUFIDUCIAL  [FIDUCIAL-MICRO]  108.08,129.16 0 bottom
FD167  FIDUCIALUFIDUCIAL  [FIDUCIAL-MICRO]  117.48,89.79 0 top
FD168  FIDUCIALUFIDUCIAL  [FIDUCIAL-MICRO]  117.48,89.79 0 bottom
FD169  FIDUCIALUFIDUCIAL  [FIDUCIAL-MICRO]  119.25,129.16 0 top
FD170  FIDUCIALUFIDUCIAL  [FIDUCIAL-MICRO]  119.25,129.16 0 bottom
FD171  FIDUCIALUFIDUCIAL  [FIDUCIAL-MICRO]  128.65,89.79 0 top
FD172  FIDUCIALUFIDUCIAL  [FIDUCIAL-MICRO]  128.65,89.79 0 bottom
FD173  FIDUCIALUFIDUCIAL  [FIDUCIAL-MICRO]  130.43,129.16 0 top
FD174  FIDUCIALUFIDUCIAL  [FIDUCIAL-MICRO]  130.43,129.16 0 bottom
FD175  FIDUCIALUFIDUCIAL  [FIDUCIAL-MICRO]  139.83,89.79 0 top
FD176  FIDUCIALUFIDUCIAL  [FIDUCIAL-MICRO]  139.83,89.79 0 bottom
FD177  FIDUCIALUFIDUCIAL  [FIDUCIAL-MICRO]  141.61,129.16 0 top
FD178  FIDUCIALUFIDUCIAL  [FIDUCIAL-MICRO]  141.61,129.16 0 bottom
FD179  FIDUCIALUFIDUCIAL  [FIDUCIAL-MICRO]  151,89.79 0 top
FD180  FIDUCIALUFIDUCIAL  [FIDUCIAL-MICRO]  151,89.79 0 bottom
FD181  FIDUCIALUFIDUCIAL  [FIDUCIAL-MICRO]  152.78,129.16 0 top
FD182  FIDUCIALUFIDUCIAL  [FIDUCIAL-MICRO]  152.78,129.16 0 bottom
FD183  FIDUCIALUFIDUCIAL  [FIDUCIAL-MICRO]  162.18,89.79 0 top
FD184  FIDUCIALUFIDUCIAL  [FIDUCIAL-MICRO]  162.18,89.79 0 bottom
FD185  FIDUCIALUFIDUCIAL  [FIDUCIAL-MICRO]  163.96,129.16 0 top
FD186  FIDUCIALUFIDUCIAL  [FIDUCIAL-MICRO]  163.96,129.16 0 bottom
FD187  FIDUCIALUFIDUCIAL  [FIDUCIAL-MICRO]  173.36,89.79 0 top
FD188  FIDUCIALUFIDUCIAL  [FIDUCIAL-MICRO]  173.36,89.79 0 bottom
FD189  FIDUCIALUFIDUCIAL  [FIDUCIAL-MICRO]  175.13,129.16 0 top
FD190  FIDUCIALUFIDUCIAL  [FIDUCIAL-MICRO]  175.13,129.16 0 bottom
FD191  FIDUCIALUFIDUCIAL  [FIDUCIAL-MICRO]  184.53,89.79 0 top
FD192  FIDUCIALUFIDUCIAL  [FIDUCIAL-MICRO]  184.53,89.79 0 bottom
FG_SDA  JUMPER-SMT_2_NC_TRACE_SILK  [SMT-JUMPER_2_NC_TRACE_SILK]  14.92,35.75 90 bottom
FG_SDA1  JUMPER-SMT_2_NC_TRACE_SILK  [SMT-JUMPER_2_NC_TRACE_SILK]  26.1,35.75 90 bottom
FG_SDA2  JUMPER-SMT_2_NC_TRACE_SILK  [SMT-JUMPER_2_NC_TRACE_SILK]  37.27,35.75 90 bottom
FG_SDA3  JUMPER-SMT_2_NC_TRACE_SILK  [SMT-JUMPER_2_NC_TRACE_SILK]  48.45,35.75 90 bottom
FG_SDA4  JUMPER-SMT_2_NC_TRACE_SILK  [SMT-JUMPER_2_NC_TRACE_SILK]  59.63,35.75 90 bottom
FG_SDA5  JUMPER-SMT_2_NC_TRACE_SILK  [SMT-JUMPER_2_NC_TRACE_SILK]  70.8,35.75 90 bottom
FG_SDA6  JUMPER-SMT_2_NC_TRACE_SILK  [SMT-JUMPER_2_NC_TRACE_SILK]  81.98,35.75 90 bottom
FG_SDA7  JUMPER-SMT_2_NC_TRACE_SILK  [SMT-JUMPER_2_NC_TRACE_SILK]  93.15,35.75 90 bottom
FG_SDA8  JUMPER-SMT_2_NC_TRACE_SILK  [SMT-JUMPER_2_NC_TRACE_SILK]  104.33,35.75 90 bottom
FG_SDA9  JUMPER-SMT_2_NC_TRACE_SILK  [SMT-JUMPER_2_NC_TRACE_SILK]  115.51,35.75 90 bottom
FG_SDA10  JUMPER-SMT_2_NC_TRACE_SILK  [SMT-JUMPER_2_NC_TRACE_SILK]  126.68,35.75 90 bottom
FG_SDA11  JUMPER-SMT_2_NC_TRACE_SILK  [SMT-JUMPER_2_NC_TRACE_SILK]  137.86,35.75 90 bottom
FG_SDA12  JUMPER-SMT_2_NC_TRACE_SILK  [SMT-JUMPER_2_NC_TRACE_SILK]  149.03,35.75 90 bottom
FG_SDA13  JUMPER-SMT_2_NC_TRACE_SILK  [SMT-JUMPER_2_NC_TRACE_SILK]  160.21,35.75 90 bottom
FG_SDA14  JUMPER-SMT_2_NC_TRACE_SILK  [SMT-JUMPER_2_NC_TRACE_SILK]  171.39,35.75 90 bottom
FG_SDA15  JUMPER-SMT_2_NC_TRACE_SILK  [SMT-JUMPER_2_NC_TRACE_SILK]  182.56,35.75 90 bottom
FG_SDA16  JUMPER-SMT_2_NC_TRACE_SILK  [SMT-JUMPER_2_NC_TRACE_SILK]  14.92,76.9 90 bottom
FG_SDA17  JUMPER-SMT_2_NC_TRACE_SILK  [SMT-JUMPER_2_NC_TRACE_SILK]  26.1,76.9 90 bottom
FG_SDA18  JUMPER-SMT_2_NC_TRACE_SILK  [SMT-JUMPER_2_NC_TRACE_SILK]  37.27,76.9 90 bottom
FG_SDA19  JUMPER-SMT_2_NC_TRACE_SILK  [SMT-JUMPER_2_NC_TRACE_SILK]  48.45,76.9 90 bottom
FG_SDA20  JUMPER-SMT_2_NC_TRACE_SILK  [SMT-JUMPER_2_NC_TRACE_SILK]  59.63,76.9 90 bottom
FG_SDA21  JUMPER-SMT_2_NC_TRACE_SILK  [SMT-JUMPER_2_NC_TRACE_SILK]  70.8,76.9 90 bottom
FG_SDA22  JUMPER-SMT_2_NC_TRACE_SILK  [SMT-JUMPER_2_NC_TRACE_SILK]  81.98,76.9 90 bottom
FG_SDA23  JUMPER-SMT_2_NC_TRACE_SILK  [SMT-JUMPER_2_NC_TRACE_SILK]  93.15,76.9 90 bottom
FG_SDA24  JUMPER-SMT_2_NC_TRACE_SILK  [SMT-JUMPER_2_NC_TRACE_SILK]  104.33,76.9 90 bottom